# Altium PCB 3-motors-1-board.pcbdoc (part 1 of 2)
Units mil, origin at the board's own origin, x right, y up, seen from the top; angles counter-clockwise.
Board outline 3965 x 3335 mil, 4 copper layers (Top Layer, GND, PWR, Bottom Layer), stack 37.817 mil thick; 63 components, 69 nets, 278 pads, 85 vias.
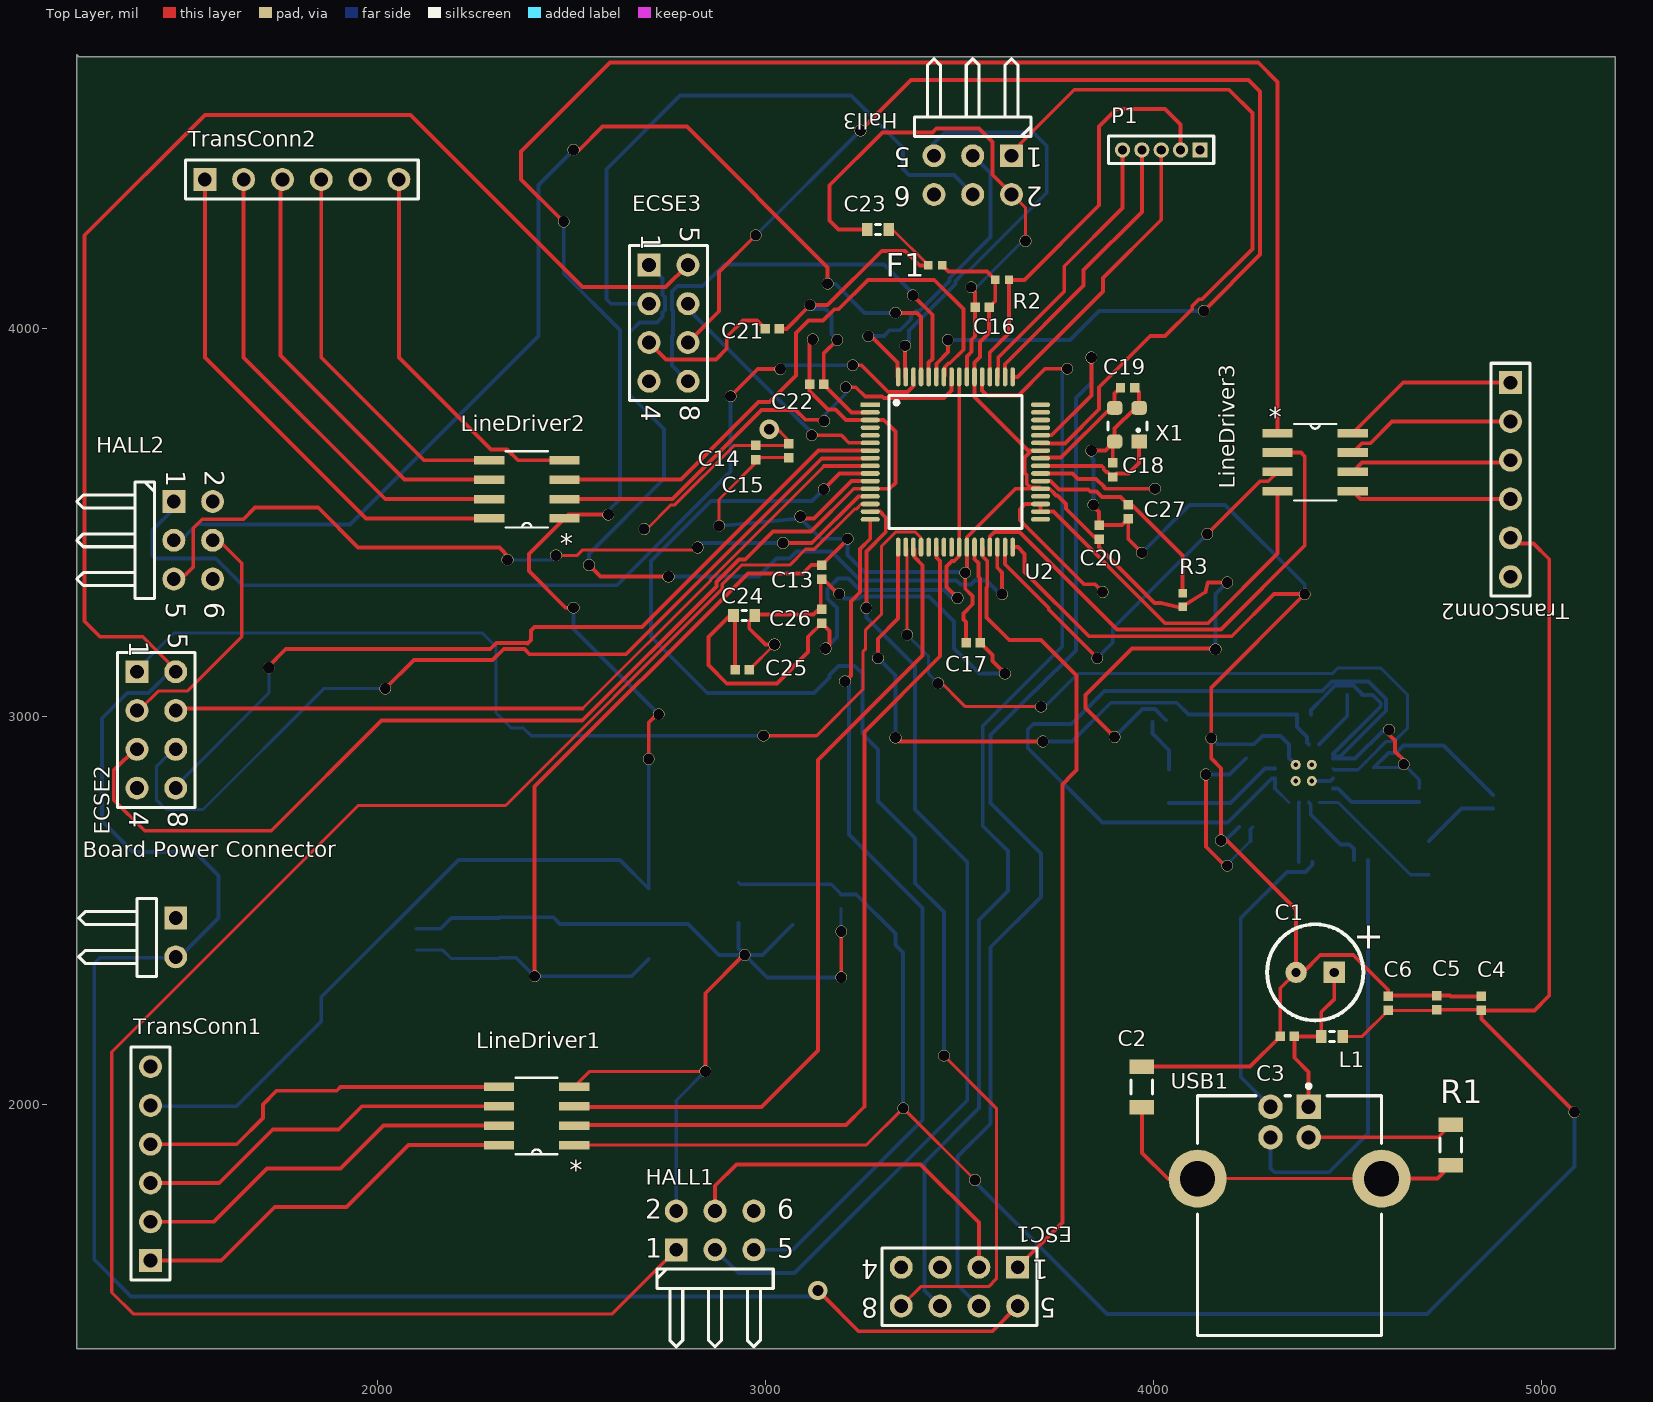
[diagram p0: Top Layer view]
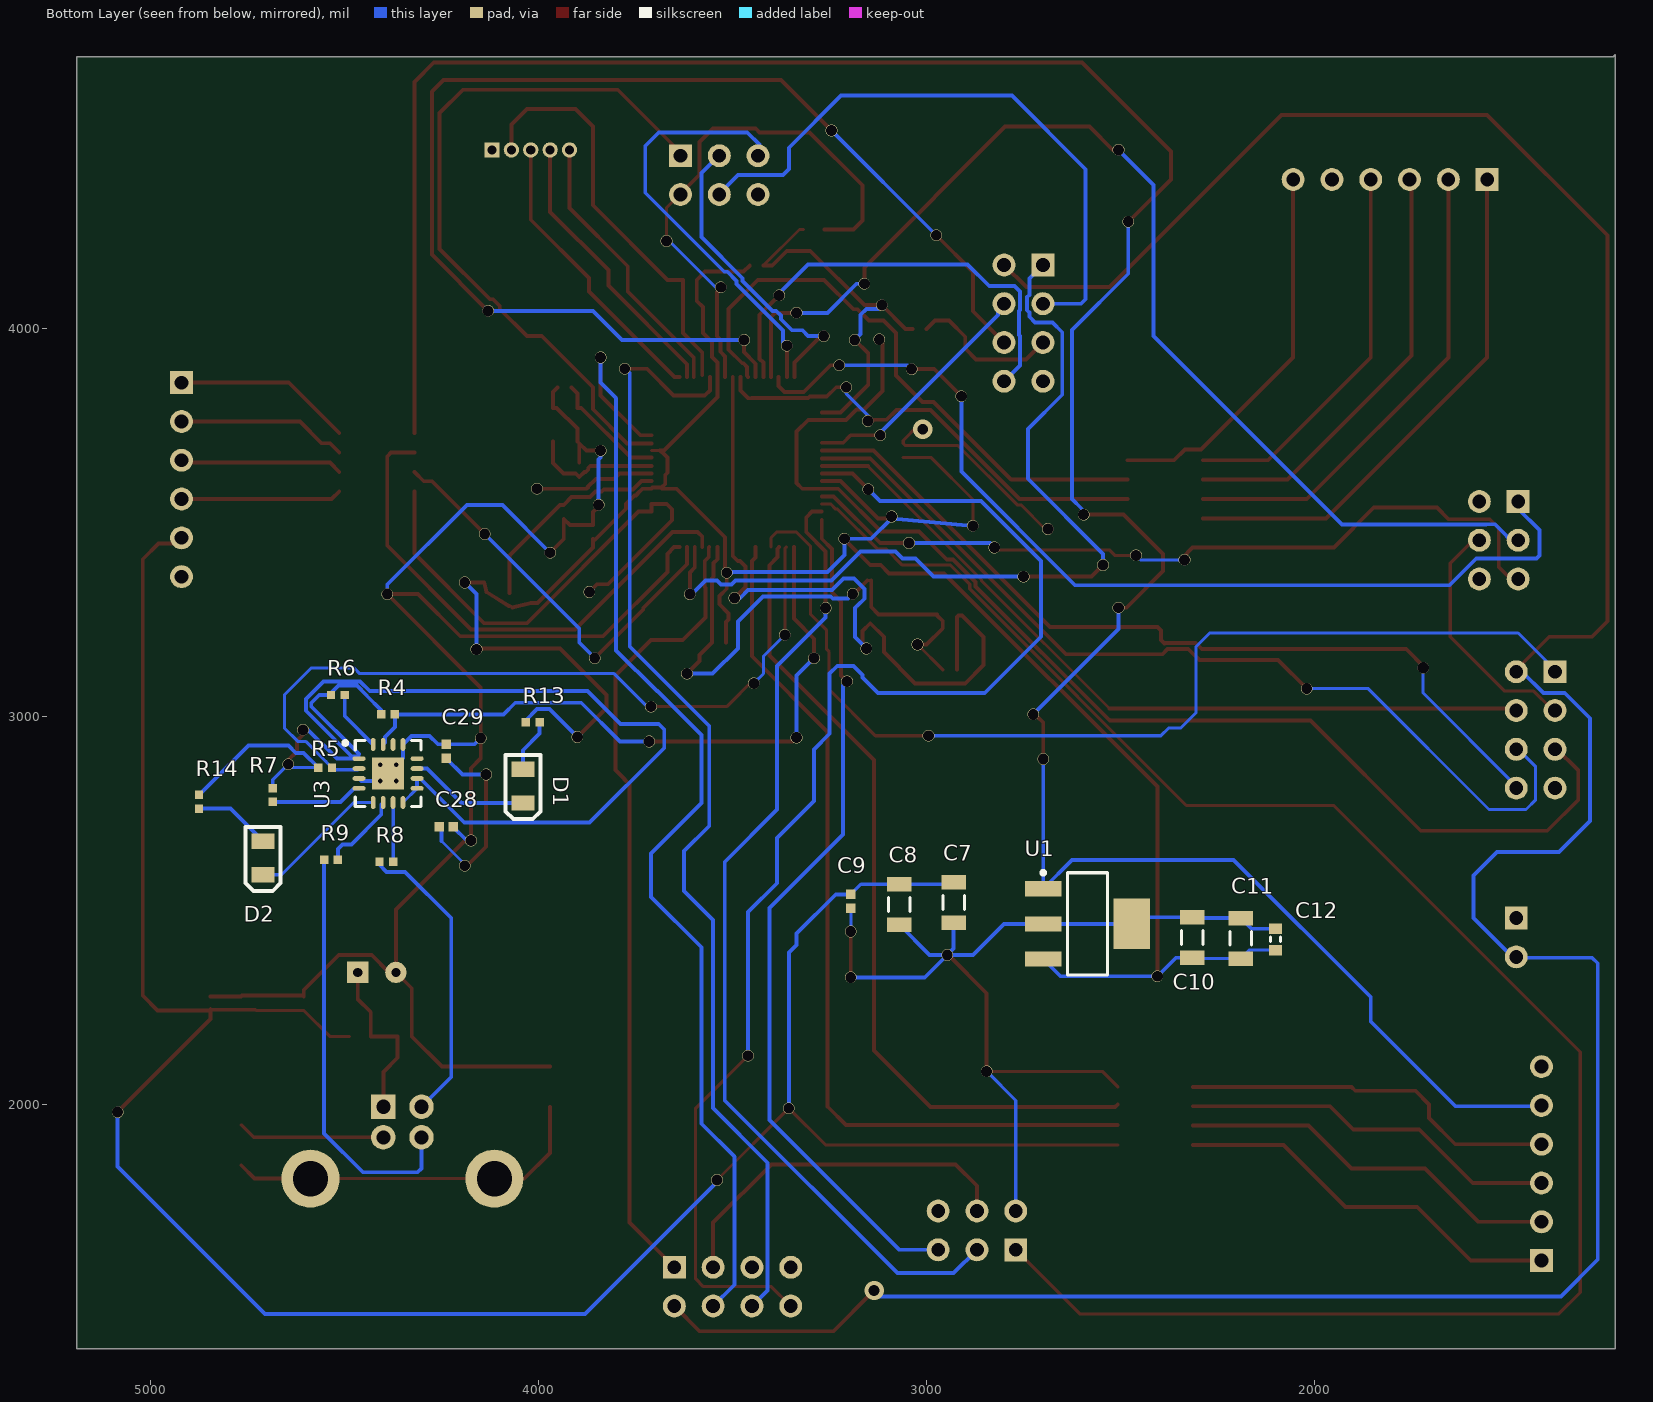
[diagram p1: Bottom Layer view, seen from below]
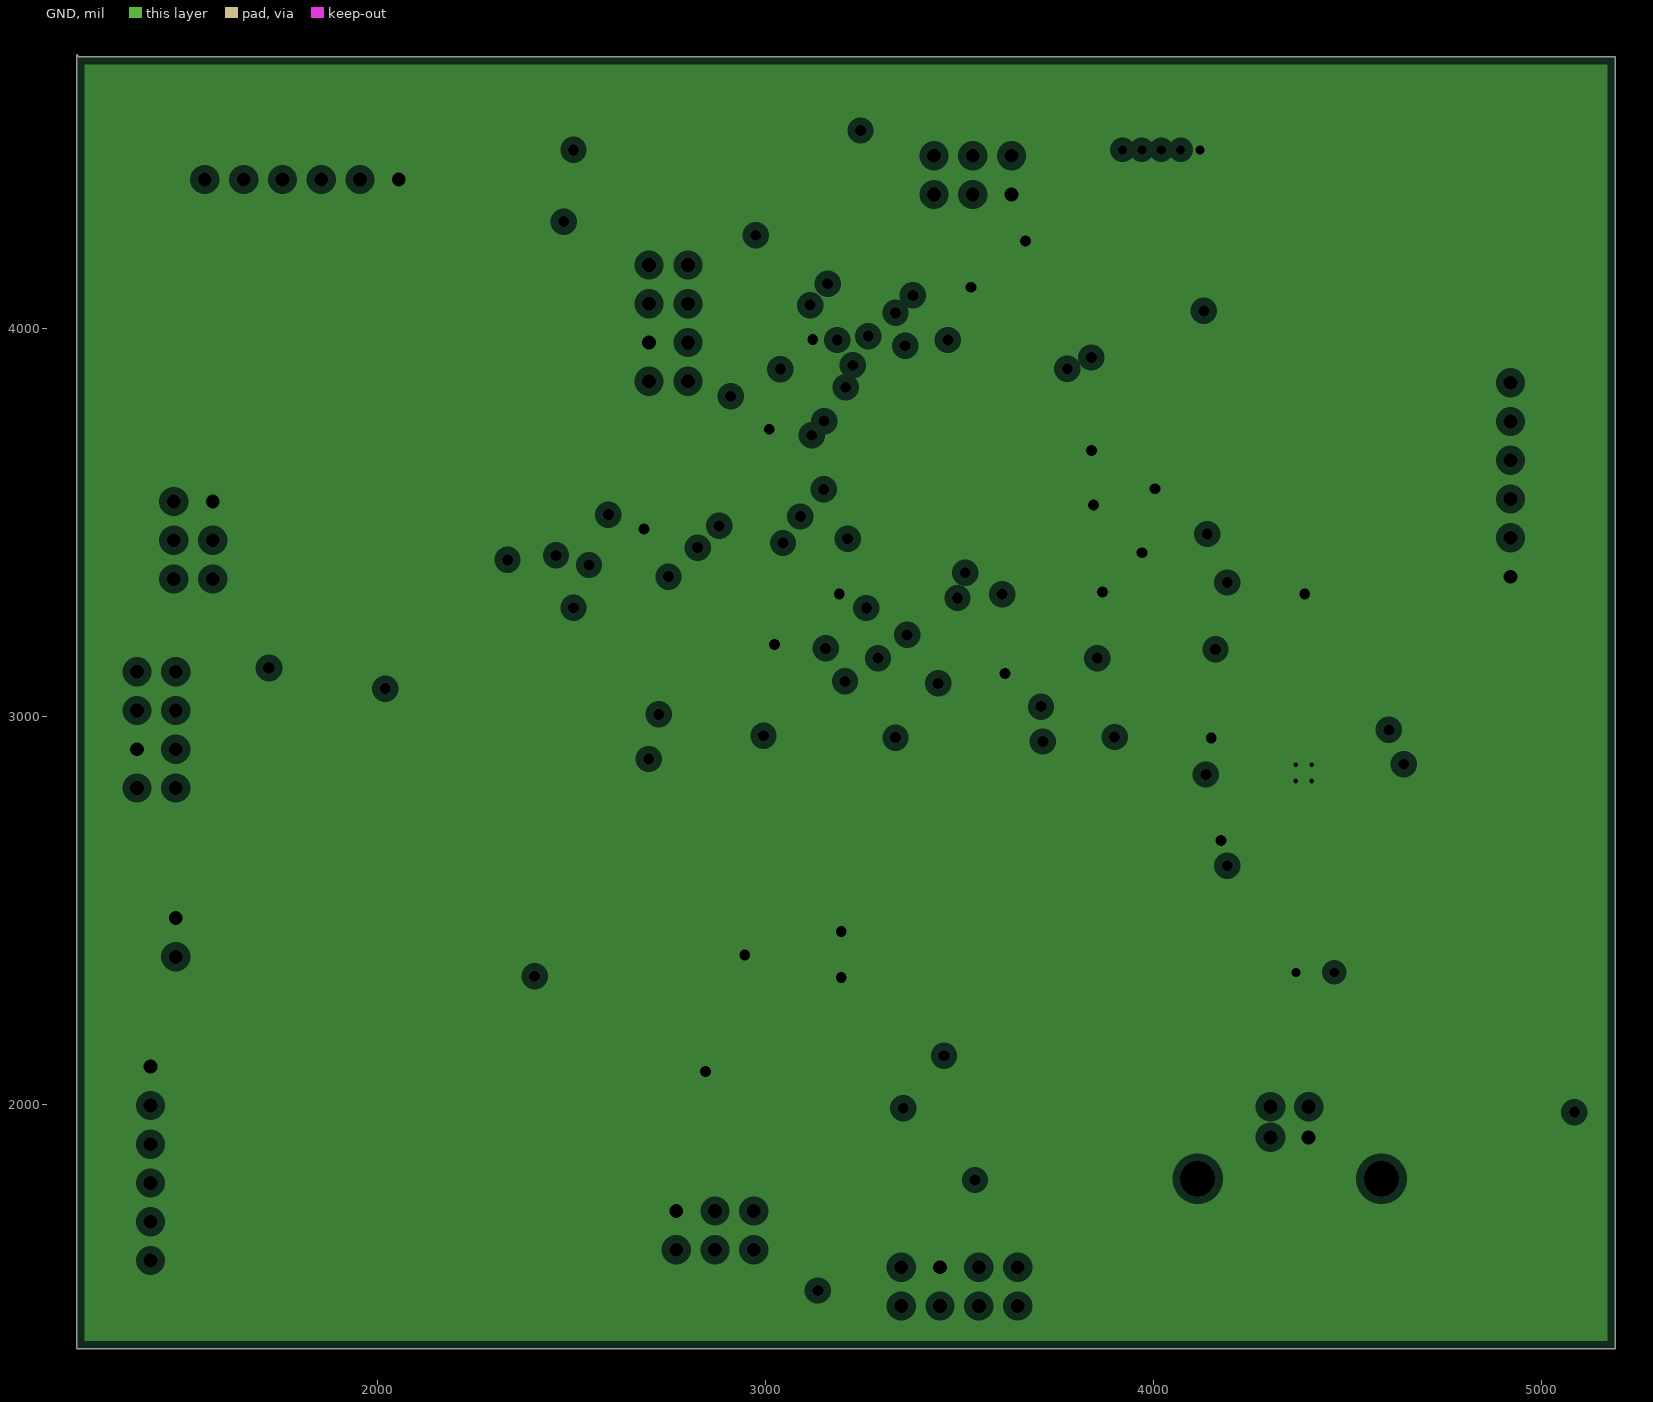
[diagram p2: GND, clearances drawn from the general rule]
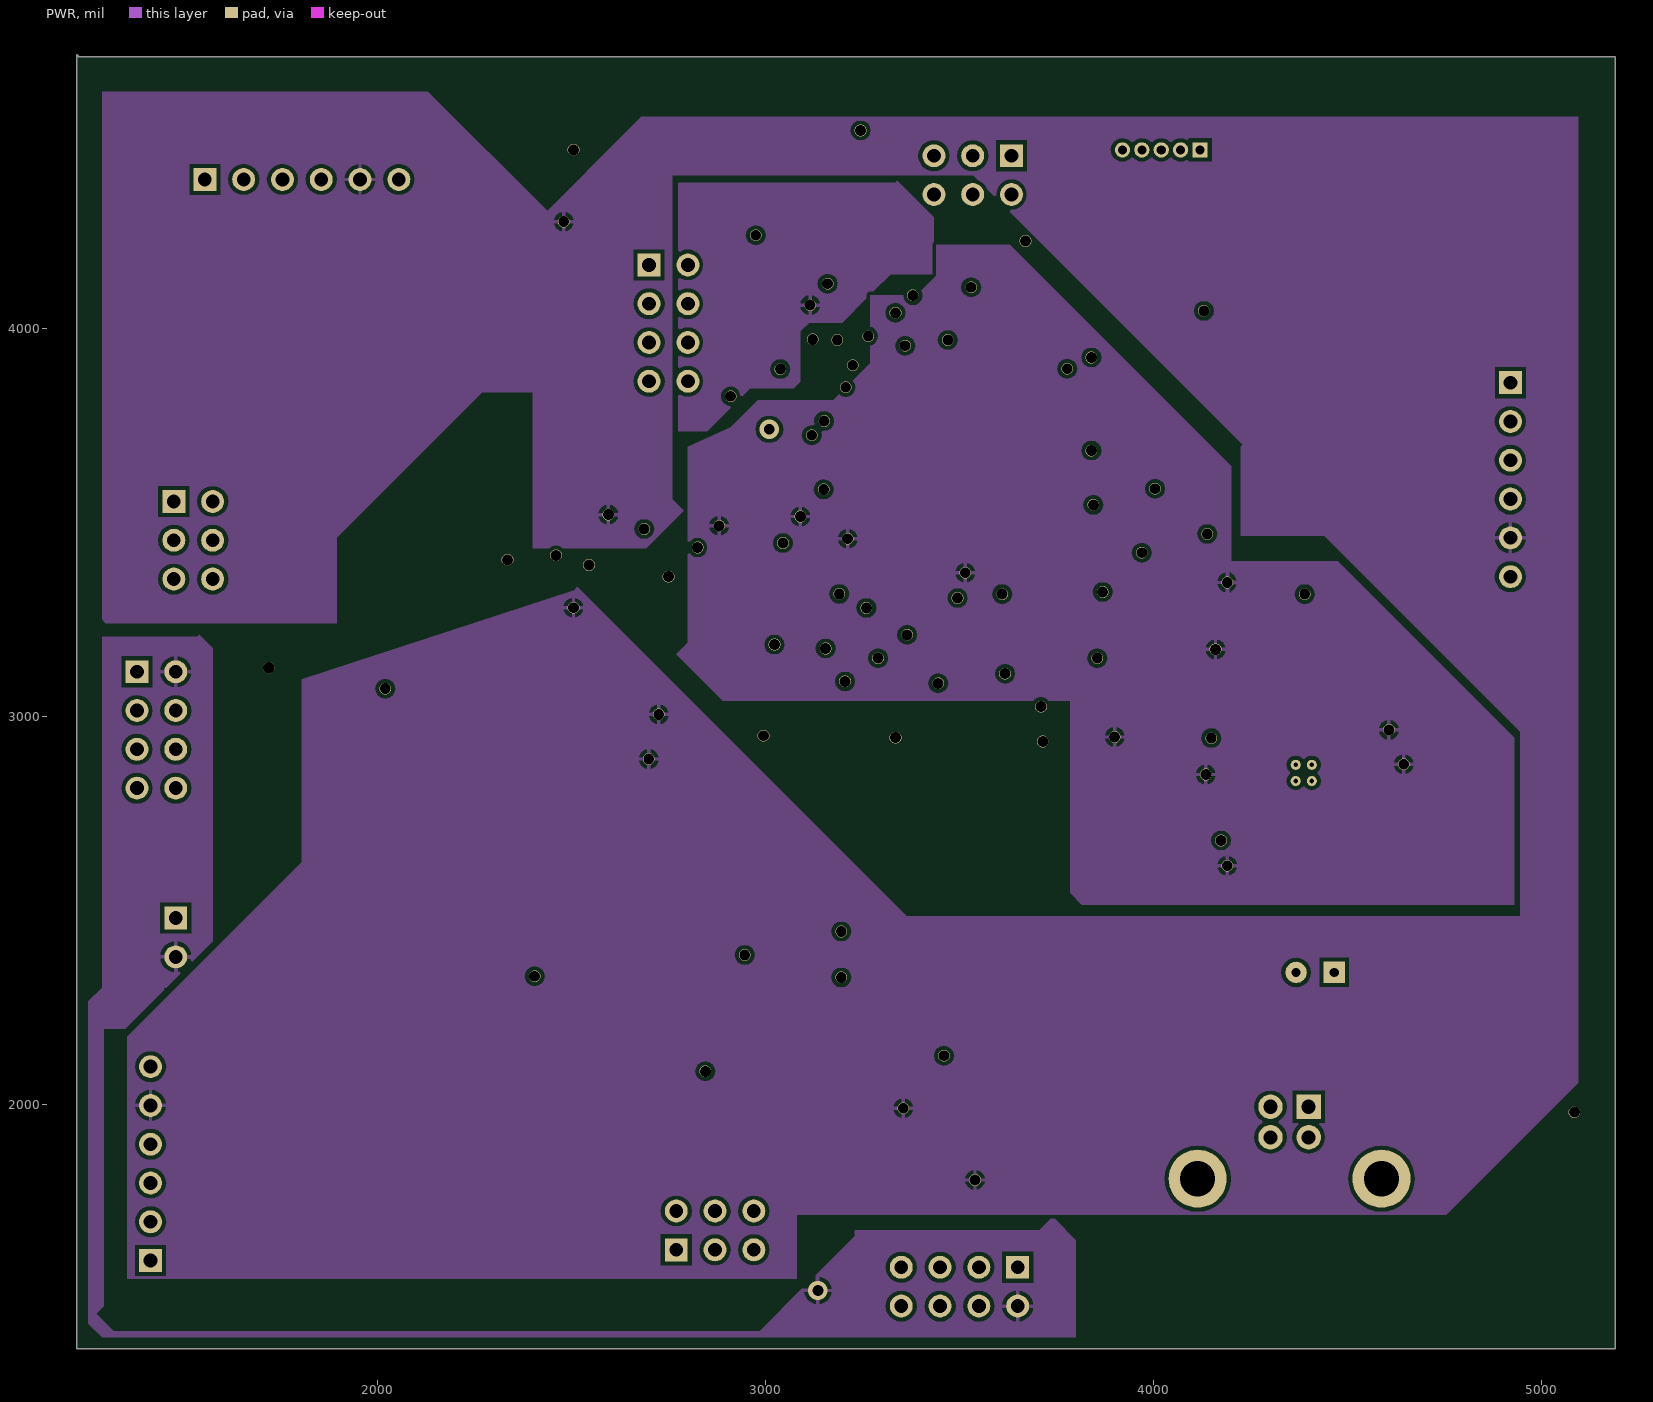
[diagram p3: PWR]
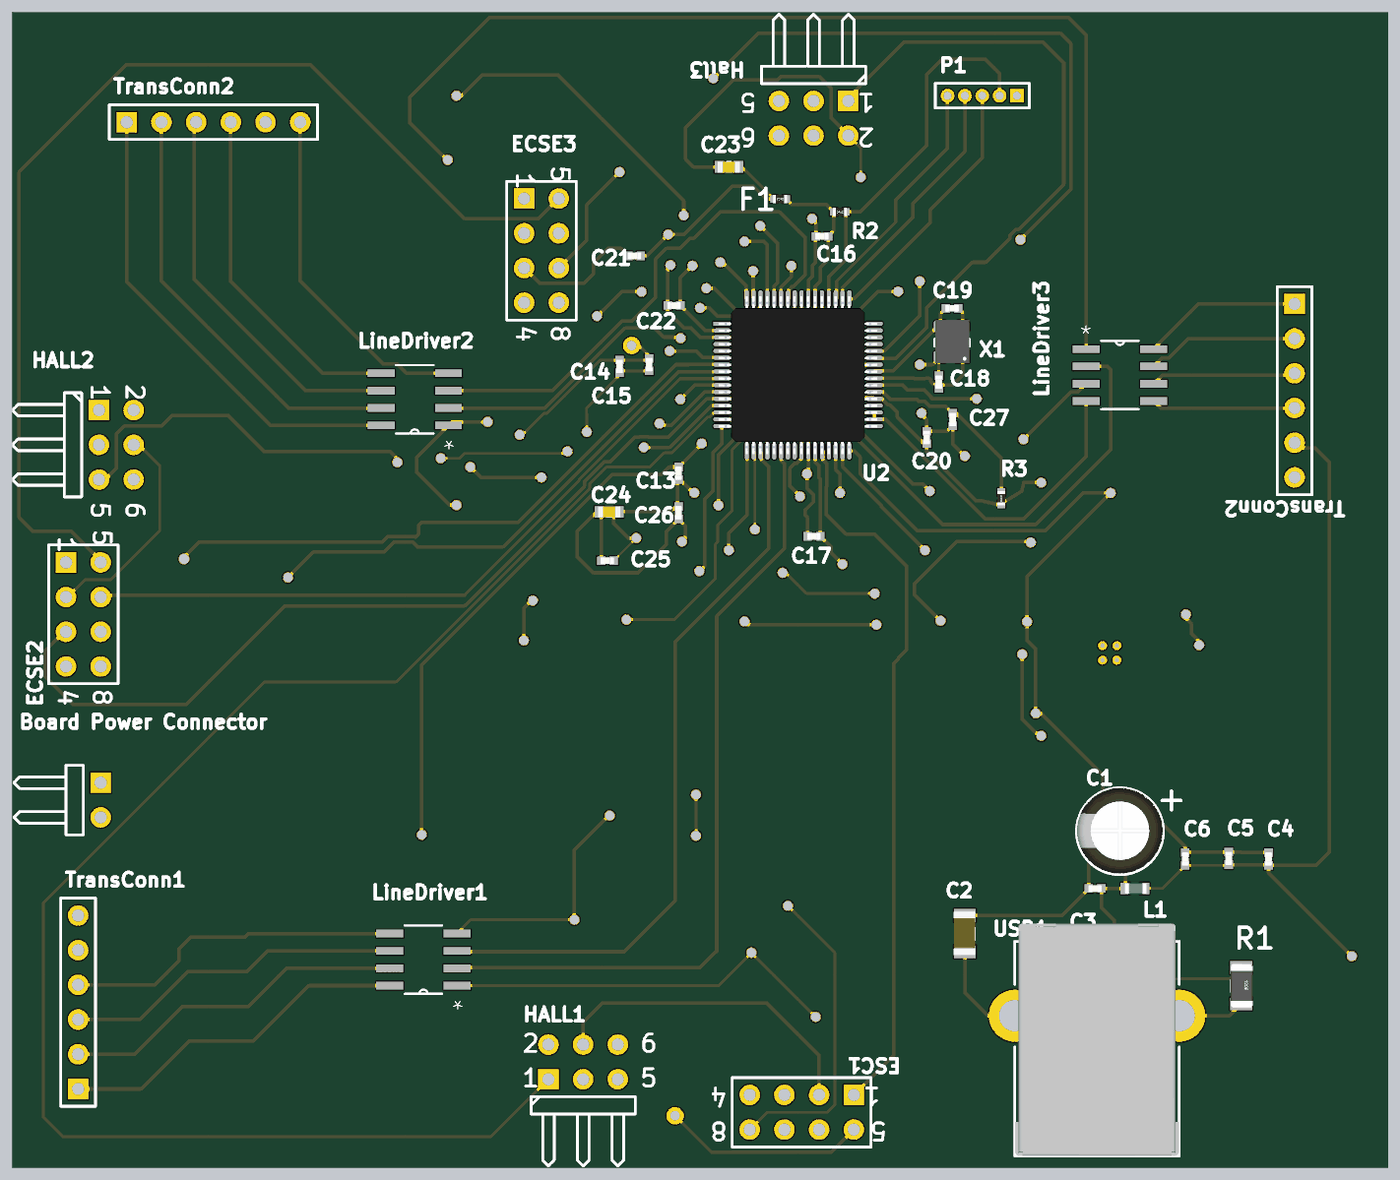
[diagram p4: 3D render of the assembled board from above, using the file's embedded part models]
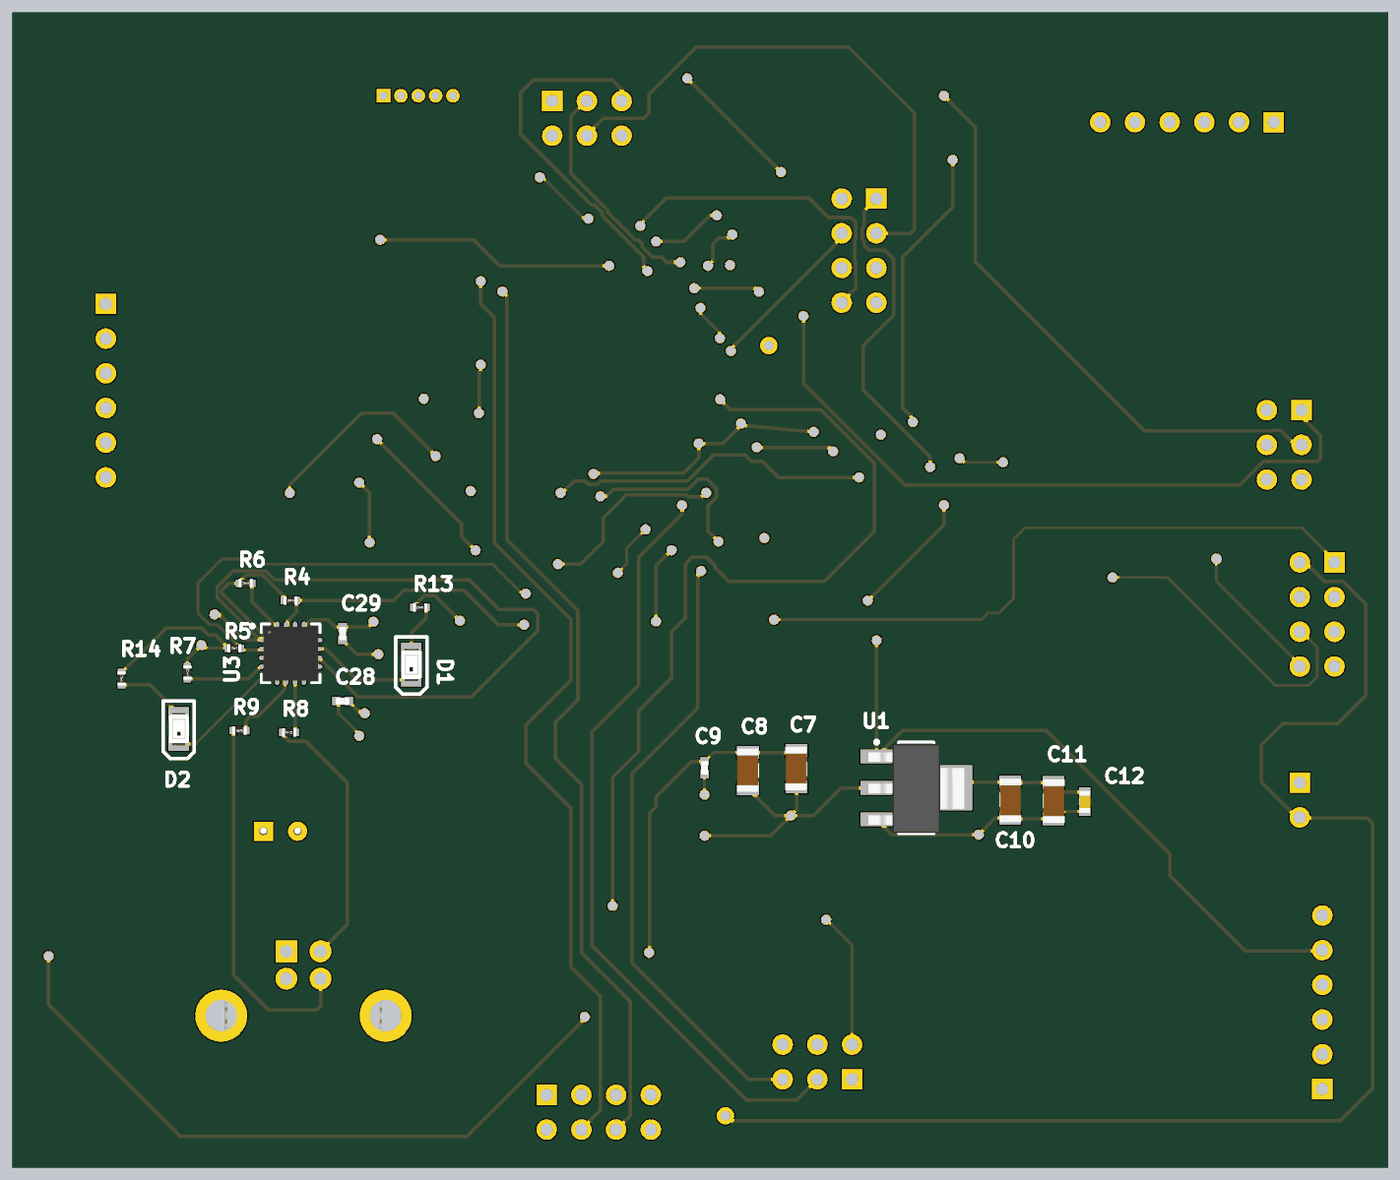
[diagram p5: 3D render of the assembled board from below, using the file's embedded part models]

## Layer stack, top to bottom
Top Solder: solder mask 0.4, Solder Resist, Dk 3.5
Top Layer: signal copper 1.4
Dielectric 3: dielectric 10, Dk 4.2
GND: plane copper 1, net GND
Dielectric 1: dielectric 12.6, FR-4, Dk 4.8
PWR: signal copper 1.417
Dielectric 2: dielectric 10, Dk 4.2
Bottom Layer: signal copper 1.4
Bottom Solder: solder mask 0.4, Solder Resist, Dk 3.5

## Board outline
1225,4705 1230,4700 5190,4700 5190,1370 1225,1370

## Design rules (kind name [scope] priority, off if disabled: settings)
Clearance Clearance_1 [All] p1: gap=10 ignorepadtopadclearanceinfootprint=TRUE except(0: Arc-Hole Track-Hole SMDPad-Hole THPad-Hole Via-Hole Fill-Hole Poly-Hole Region-Hole Text-Hole; 6: Arc-Arc Arc-Track Arc-SMDPad Arc-THPad Track-Track Track-SMDPad Track-THPad SMDPad-SMDPad SMDPad-THPad THPad-THPad)
Clearance [All] p2: gap=10 ignorepadtopadclearanceinfootprint=TRUE except(0: Arc-Hole Track-Hole SMDPad-Hole THPad-Hole Via-Hole Fill-Hole Poly-Hole Region-Hole Text-Hole; 6: Arc-Arc Arc-Track Arc-SMDPad Arc-THPad Track-Track Track-SMDPad Track-THPad SMDPad-SMDPad SMDPad-THPad THPad-THPad)
MinimumSolderMaskSliver [All] p1: minsoldermaskwidth=2
PlaneClearance [All] p1: clearance=20
PlaneConnect [All] p1: planeconnectstyle=Relief reliefexpansion=10 reliefentries=4 reliefconductorwidth=10 reliefairgap=8
PolygonConnect [All] p1: connectstyle=Relief reliefconductorwidth=10 reliefentries=4 polygonreliefangle="90 Angle" airgapwidth=10
RoutingVias [All] p1: holewidth=28 width=30 viastyle="Through Hole" minholewidth=28 minwidth=30 maxholewidth=28 maxwidth=50
SilkToSilkClearance [All] p1: silktosilkclearance=2
SilkToSolderMaskClearance [IsPad] p1: minsilkscreentomaskgap=2 clearancetoexposedcopper=TRUE
SolderMaskExpansion [All] p1: expansion=4
Width [All] p1: maxlimit=10 minlimit=6 preferedwidth=10 toplayer_prefwidth=8 midlayer1_minwidth=10 bottomlayer_prefwidth=8 minimp=50.000000 maximp=50.000000 favimp=50.000000
25 further rules are at their usual default settings.

## Components (designator, comment, footprint, x,y, rotation, side; value= is the part's Value field where it differs from the comment)
"Board Power Connector" "Molex 0428202224" HDR1X2H 1480,2480 r270 top
C1 "100uF" CapAlu6.3mmx12.5mm 4416.89,2340 r0 top
C2 "10nF" CAP_1206 3970,2045 r270 top
C3 "10nF" CAP_0402_M 4345,2175 r0 top
C4 "100nF" CAP_0402_M 4845,2260 r270 top
C5 "2.2uF" CAP_0402_M 4730,2261.89 r270 top
C6 "2.2uF" CAP_0402_M 4605,2260 r270 top
C7 "100uF" CAP_1206 2930,2520 r270 bottom
C8 "100uF" CAP_1206 3070,2515 r270 bottom
C9 "1uF" CAP_0402_M 3195,2523.11 r90 bottom
C10 "100uF" CAP_1206 2315,2430 r90 bottom
C11 "100uF" CAP_1206 2190,2427.83 r90 bottom
C12 "10uF" CAP_0603 2100,2425 r90 bottom
C13 "10nF" CAP_0402_M 3145,3371.89 r90 top
C14 "100nF" CAP_0402_M 3060,3685 r270 top
C15 "100nF" CAP_0402_M 2975,3680 r270 top
C16 "10nF" CAP_0402_M 3558.39,4055 r0 top
C17 "100nF" CAP_0402_M 3535,3190 r180 top
C18 "13pF" CAP_0402_M 3895,3635 r270 top
C19 "13pF" CAP_0402_M 3933.11,3847.4 r180 top
C20 "100nF" CAP_0402_M 3860,3475 r270 top
C21 "10nF" CAP_0402_M 3017.92,3998.6 r0 top
C22 "100nF" CAP_0402_M 3131.89,3855.57 r0 top
C23 "10uF" CAP_0603 3290,4255 r0 top
C24 "2.2uF" CAP_0603 2945,3260 r180 top
C25 "1uF" CAP_0402_M 2940,3120 r180 top
C26 "100nF" CAP_0402_M 3145,3258.11 r270 top
C27 "100nF" CAP_0402_M 3935,3526.89 r90 top
C28 "100nF" CAP_0402_M 4238.11,2715 r0 bottom
C29 "100nF" CAP_0402_M 4238.11,2910 r270 bottom
D1 "Led Red" "TOPLED 0805" 4040,2820 r270 bottom
D2 "Led Red" "TOPLED 0805" 4710,2635 r270 bottom
ECSE2 "Molex 430450812" HDR2X4_CEN 1380,3115 r270 top
ECSE3 "Molex 430450812" HDR2X4_CEN 2700,4163.56 r270 top
ESC1 "Molex 430450812" HDR2X4_CEN 3650,1580 r180 top
F1 "550mA" RES_0402_M 3437.72,4162.35 r180 top
HALL1 "Molex 430450600" HDR2X3H 2770,1625 r0 top
HALL2 "Molex 430450600" HDR2X3H 1475,3553.78 r270 top
Hall3 "Molex 430450600" HDR2X3H 3634.07,4445 r180 top
L1 "200R" IND_0603 4460,2175 r0 top
LineDriver1 "SN75LBC179D" D8 2410,1970 r180 top
LineDriver2 "SN75LBC179D" D8 2385,3585 r180 top
LineDriver3 "SN75LBC179D" D8 4416.71,3655 r0 top
P1 "MHDR1X5" MHDR1X5 4120,4460 r180 top
R1 "1M" RES_1206 4766.22,1895 r270 top
R2 "10k" RES_0402_M 3610,4125 r0 top
R3 "10k" RES_0402_M 4075,3300 r90 top
R4 "10k" RES_0402_M 4388.11,3005 r0 bottom
R5 "10k" RES_0402_M 4550,2867.65 r0 bottom
R6 "10k" RES_0402_M 4517.28,3055 r0 bottom
R7 "10k" RES_0402_M 4685,2797.28 r90 bottom
R8 "27" RES_0402_M 4392.28,2625 r180 bottom
R9 "27" RES_0402_M 4535,2630 r180 bottom
R13 "120" RES_0402_M 4015,2985 r0 bottom
R14 "120" RES_0402_M 4875,2780 r90 bottom
TransConn1 "Header 6" HDR1X6 1415,1597.17 r90 top
TransConn2 "Header 6" HDR1X6 4920,3860 r270 top
TransConn2 "Header 6" HDR1X6 1555,4383.8 r0 top
U1 "MCP1825S-3302E/DB" SOT230P700X180-4N 2585,2465 r180 bottom
U2 "TM4C123GH6PMI" TSQFP50P1200X1200X120-64N 3341.85,3875 r0 top
U3 "FT230XQ" QFN65P400X400X80_HS-17N 4387.79,2852.67 r180 bottom
USB1 "USB type-B jack" USB2.5-2H4E 4350.79,1954.37 r270 top
X1 "CRYSTAL 16MHZ" CRYSTAL_3.2x2.5 3962.99,3708.39 r180 top

## Footprints (in the part's own frame and the unit in brackets; to place one, negate y for a bottom-side part, rotate by r counter-clockwise, add the part's x,y. Pads: shape width x height; smd on the part's side, far side on the other; paste and mask are expansions set on the pad)
CAP_0402_M [mm] "Chip Capacitor, 2-Leads, Body 1.00x0.50mm, IPC Medium Density"
  rect 0.62x0.62 smd: 1(-0.46,0) 2(0.46,0)
  body extent -0.5,-0.26 0.5,0.27, height 0.36
CAP_0603 [mm] "Chip Capacitor, 2-Leads, Body 1,6x0,8mm, IPC High Density"
  rect 0.7x0.85 smd: 1(-0.7,0) 2(0.7,0)
  silkscreen extent -0.15,-0.33 0.15,0.33, body extent -0.8,-0.42 0.8,0.38, height 0.7
CAP_1206 [mm] "Chip Capacitor, 2-Leads, Body 3,1x1,6mm, IPC High Density"
  rect 0.95x1.6 smd: 1(-1.325,0) 2(1.325,0)
  silkscreen extent -0.45,-0.7 0.45,0.7, body extent -1.62,-0.82 1.57,0.78, height 1.6
CapAlu6.3mmx12.5mm [mm] "Capacitor Aluminum 6.3mm OD"
  rect 1.4x1.4 hole 0.6: 1(1.25,0)
  round 1.4 hole 0.6: 2(-1.25,0)
  silkscreen extent -3.15,-3.15 3.15,3.15, body extent -3.15,-3.11 3.15,3.19, height 12
CRYSTAL_3.2x2.5 [mm]
  rect 1x0.9 smd: 1(0,0)
  rrect50% 1x0.9 smd: 2(0,-2.2) 3(1.6,-2.2) 4(1.6,0)
  silkscreen extent -0.51,-1.27 2.03,-0.69, body extent -0.5,-2.7 2,0.5, height 0.93
D8 [mil]
  rect 78x22 smd: 1(-97,75) 2(-97,25) 3(-97,-25) 4(-97,-75) 5(97,-75) 6(97,-25) 7(97,25) 8(97,75)
  silkscreen extent -54,-98 54,98, body extent 0,0 10,10, height 10
HDR1X2H [mm] "Connector; Header; 2 Position; Right Angle"
  rect 1.5x1.5 hole 0.9: 1(0,0)
  round 1.5 hole 0.9: 2(2.54,0)
  silkscreen extent -1.27,-6.35 3.81,-1.27
HDR1X6 [mm] "Connector; Header; 6 Position"
  rect 1.5x1.5 hole 0.9: 1(0,0)
  round 1.5 hole 0.9: 2(2.54,0) 3(5.08,0) 4(7.62,0) 5(10.16,0) 6(12.7,0)
  silkscreen extent -1.27,-1.27 13.97,1.27
HDR2X3H [mm] "Connector; Header; 3x2 Position; Right Angle"
  rect 1.5x1.5 hole 0.9: 1(0,0)
  round 1.5 hole 0.9: 2(0,2.54) 3(2.54,0) 4(2.54,2.54) 5(5.08,0) 6(5.08,2.54)
  silkscreen extent -1.27,-6.35 6.35,-1.27
HDR2X4_CEN [mm] "Connector; Header; 4x2 Position"
  rect 1.5x1.5 hole 0.9: 1(0,0)
  round 1.5 hole 0.9: 2(2.54,0) 3(5.08,0) 4(7.62,0) 5(0,2.54) 6(2.54,2.54) 7(5.08,2.54) 8(7.62,2.54)
  silkscreen extent -1.27,-1.27 8.89,3.81
IND_0603 [mm]
  rect 0.7x0.85 smd: 1(-0.7,0) 2(0.7,0)
  silkscreen extent -0.15,-0.33 0.15,0.33, body extent -0.74,-0.4 0.86,0.4, height 0.95
MHDR1X5 [mm] "Connector; Header; 5 Position"
  rect 1x1 hole 0.6: 1(0,0)
  round 1 hole 0.6: 2(1.27,0) 3(2.54,0) 4(3.81,0) 5(5.08,0)
  silkscreen extent -0.9,-0.9 5.98,0.9
QFN65P400X400X80_HS-17N [mm] "QFN, 16-Leads, Body 4.00x4.00mm, Pitch 0.65mm, Thermal Pad 2.08x2.08mm, IPC Medium Density"
  oval 0.85x0.3 smd: 1(-1.9,0.975) 2(-1.9,0.325) 3(-1.9,-0.325) 4(-1.9,-0.975) 9(1.9,-0.975) 10(1.9,-0.325) 11(1.9,0.325) 12(1.9,0.975)
  oval 0.3x0.85 smd: 5(-0.975,-1.9) 6(-0.325,-1.9) 7(0.325,-1.9) 8(0.975,-1.9) 13(0.975,1.9) 14(0.325,1.9) 15(-0.325,1.9) 16(-0.975,1.9)
  round 0.66 hole 0.305: 17(-0.516,-0.493) 17(-0.516,0.567) 17(0.538,-0.493) 17(0.538,0.567)
  rect 2.08x2.08 smd: 17(0,0)
  silkscreen extent -2.93,-2.15 2.15,2.15, body extent -2,-2 2,2, height 0.92
RES_0402_M [mm] "Chip Resistor, 2-Leads, Body 1.00x0.50mm, IPC Medium Density"
  rect 0.55x0.55 smd: 1(-0.45,0) 2(0.45,0)
  body extent -0.52,-0.3 0.52,0.3, height 0.34
RES_1206 [mm] "Chip Resistor 2-Leads, Body 3,1x1,6mm, IPC High Density"
  rect 0.95x1.6 smd: 1(-1.325,0) 2(1.325,0)
  silkscreen extent -0.45,-0.7 0.45,0.7, body extent -1.59,-0.76 1.61,0.84, height 1
SOT230P700X180-4N [mm] "SOT223, 4-Leads, Body 6,7x7,3mm (max), Pitch 2,30mm, IPC Medium Density"
  rect 2.4x1 smd: 1(-2.9,2.3) 2(-2.9,0) 3(-2.9,-2.3)
  rect 2.4x3.3 smd: 4(2.9,0)
  silkscreen extent -3.03,-3.35 1.3,3.47, body extent -3.5,-3.3 3.5,3.2, height 1.69
"TOPLED 0805" [mm]
  rect 1x1.5 smd: 1(-1.1,0) 2(1.1,0)
  silkscreen extent -2.03,-1.14 2.16,1.14, body extent -1.2,-0.74 1.2,0.76, height 1.45
TSQFP50P1200X1200X120-64N [mm] "TSQFP, 64-Leads, Body 12,0x12,0mm (max), Pitch 0,50mm, IPC Medium Density"
  rect 1.25x0.3 smd: 1(-1.825,-1.825)
  oval 1.25x0.3 smd: 2(-1.825,-2.325) 3(-1.825,-2.825) 4(-1.825,-3.325) 5(-1.825,-3.825) 6(-1.825,-4.325) 7(-1.825,-4.825) 8(-1.825,-5.325) 9(-1.825,-5.825) 10(-1.825,-6.325) 11(-1.825,-6.825) 12(-1.825,-7.325) 13(-1.825,-7.825) 14(-1.825,-8.325) 15(-1.825,-8.825) 16(-1.825,-9.325) 33(9.325,-9.325) 34(9.325,-8.825) 35(9.325,-8.325) 36(9.325,-7.825) 37(9.325,-7.325) 38(9.325,-6.825) 39(9.325,-6.325) 40(9.325,-5.825) 41(9.325,-5.325) 42(9.325,-4.825) 43(9.325,-4.325) 44(9.325,-3.825) 45(9.325,-3.325) 46(9.325,-2.825) 47(9.325,-2.325) 48(9.325,-1.825)
  oval 0.3x1.25 smd: 17(0,-11.15) 18(0.5,-11.15) 19(1,-11.15) 20(1.5,-11.15) 21(2,-11.15) 22(2.5,-11.15) 23(3,-11.15) 24(3.5,-11.15) 25(4,-11.15) 26(4.5,-11.15) 27(5,-11.15) 28(5.5,-11.15) 29(6,-11.15) 30(6.5,-11.15) 31(7,-11.15) 32(7.5,-11.15) 49(7.5,0) 50(7,0) 51(6.5,0) 52(6,0) 53(5.5,0) 54(5,0) 55(4.5,0) 56(4,0) 57(3.5,0) 58(3,0) 59(2.5,0) 60(2,0) 61(1.5,0) 62(1,0) 63(0.5,0) 64(0,0)
  silkscreen extent -0.6,-9.92 8.1,-1.22, body extent -2.05,-11.38 9.53,0.2, height 1
USB2.5-2H4E [mm] "Connector; USB1.1, Type B, Thru-Hole; 4 Position; Right Angle"
  rect 1.6x1.6 hole 0.92: 1(-1,1.25)
  round 1.6 hole 0.92: 2(-1,-1.25) 3(1,-1.25) 4(1,1.25)
  round 3.8 hole 2.3: 5(3.71,6.02) 6(3.71,-6.02)
  silkscreen extent -2.47,-6.02 13.99,6.02, body extent -3.03,-6 13.97,6, height 10.9

## Part data
"Board Power Connector": library part "Header 2H", "Header, 2-Pin, Right Angle", LatestRevisionDate=17-Jul-2002, LatestRevisionNote="Re-released for DXP Platform.", Publisher="Altium Limited"
C1: library part 100uF_35v_6.3x12.5, "Capacitor 35v 100uF 6.3mm", Capacitance=100µF, ESR (Equivalent Series Resistance)=-, Lifetime @ Temp.="5000 Hrs @ 105°C", Manufacturer=Nichicon, Manufacturer Part Number=UHV1V101MED, Operating Temperature="-40°C ~ 105°C", Package / Case="Radial, Can", Ripple Current="220mA @ 120Hz", Supplier Part Number 1=493-13394-ND, Tolerance=±20%, Voltage Rating=35V, Applications="General Purpose", Category=Capacitors, ComponentLink1Description=http://nichicon-us.com/english/products/pdfs/e-uhv.pdf, ComponentLink1URL=http://nichicon-us.com/english/products/pdfs/e-uhv.pdf, Height - Seated (Max)="0.492\" (12.50mm)", Impedance="100 mOhm", Lead Spacing="0.098\" (2.50mm)", Mounting Type="Through Hole", Packaging=Bulk, Polarization=Polar, Pricing 1="1=0.46, 10=0.32, 25=0.262, 50=0.224, 100=0.1919, 250=0.15992, 500=0.14394, 1000=0.12155, 2500=0.11515 (CAD)", RoHS="RoHS Compliant", Size / Dimension="0.248\" Dia (6.30mm)", Stock 1=5561, Supplier 1=Digi-Key, Surface Mount Land Size=-
C2: library part 10nF_500V_1206, "CAP CER 10000PF 500V X7R 1206", Capacitance=10000pF, Manufacturer="Samsung Electro-Mechanics America, Inc", Manufacturer Part Number=CL31B103KGFNNNE, Operating Temperature="-55°C ~ 125°C", Package / Case="1206 (3216 Metric)", Ratings=-, Supplier Part Number 1=1276-3076-1-ND, Temperature Coefficient=X7R, Tolerance=±10%, Voltage - Rated=500V, Applications="General Purpose", Category=Capacitors, ComponentLink1Description=http://www.samsungsem.com/kr/front/downloadcms.do?path=/kr/support/product-search/mlcc/__icsFiles/afieldfile/2014/11/05&fileName=S_CL31B103KGFNNNE.pdf, ComponentLink1URL=http://www.samsungsem.com/kr/front/downloadcms.do?path=/kr/support/product-search/mlcc/__icsFiles/afieldfile/2014/11/05&fileName=S_CL31B103KGFNNNE.pdf, Features=-, Height - Seated (Max)=-, Lead Spacing=-, Lead Style=-, Mounting Type="Surface Mount, MLCC", Packaging="Cut Tape (CT)", Pricing 1="1=0.34, 10=0.28, 25=0.192, 100=0.1398, 500=0.09266, 1000=0.08216 (CAD)", RoHS="RoHS Compliant", Size / Dimension="0.126\" L x 0.063\" W (3.20mm x 1.60mm)", Stock 1=9075, Supplier 1=Digi-Key, Thickness (Max)="0.055\" (1.40mm)"
C3 C13 C16 C21: library part 10nF_50V_0402, "CAP CER 10000PF 50V 10% X7R 0402", Capacitance=10000pF, Manufacturer=Kemet, Manufacturer Part Number=C0402C103K5RACTU, Operating Temperature="-55°C ~ 125°C", Package / Case="0402 (1005 Metric)", Ratings=-, Supplier Part Number 1=399-3066-1-ND, Temperature Coefficient=X7R, Tolerance=±10%, Voltage - Rated=50V, Applications="General Purpose", Category=Capacitors, ComponentLink1Description=http://www.kemet.com/docfinder?Partnumber=C0402C103K5RACTU, ComponentLink1URL=http://www.kemet.com/docfinder?Partnumber=C0402C103K5RACTU, Features=-, Height - Seated (Max)=-, Lead Spacing=-, Lead Style=-, Mounting Type="Surface Mount, MLCC", Packaging="Cut Tape (CT)", Pricing 1="1=0.14, 10=0.037, 25=0.026, 50=0.0198, 100=0.0166, 250=0.01364, 1000=0.00893, 2500=0.00804, 5000=0.00744 (CAD)", RoHS="RoHS Compliant", Size / Dimension="0.039\" L x 0.020\" W (1.00mm x 0.50mm)", Stock 1=3556921, Supplier 1=Digi-Key, Thickness (Max)="0.022\" (0.55mm)"
C4 C14 C15 C17 C20 C22 C26 C27 C28 C29: library part 100nF_50V_0402, "CAP CER 100NF 50V 20% X5R 0402", Capacitance=0.1µF, Manufacturer="TDK Corporation", Manufacturer Part Number=C1005X5R1H104M050BB, Operating Temperature="-55°C ~ 85°C", Package / Case="0402 (1005 Metric)", Ratings=-, Supplier Part Number 1=445-5943-1-ND, Temperature Coefficient=X5R, Tolerance=±20%, Voltage - Rated=50V, Applications="General Purpose", Category=Capacitors, ComponentLink1Description=http://product.tdk.com/en/catalog/datasheets/mlcc_commercial_general_en.pdf, ComponentLink1URL=http://product.tdk.com/en/catalog/datasheets/mlcc_commercial_general_en.pdf, Features=-, Height - Seated (Max)=-, Lead Spacing=-, Lead Style=-, Mounting Type="Surface Mount, MLCC", Packaging="Cut Tape (CT)", Pricing 1="1=0.18, 10=0.122, 100=0.0579, 250=0.04872, 500=0.0408, 1000=0.03348, 5000=0.02831 (CAD)", RoHS="RoHS Compliant", Size / Dimension="0.039\" L x 0.020\" W (1.00mm x 0.50mm)", Stock 1=218263, Supplier 1=Digi-Key, Thickness (Max)="0.022\" (0.55mm)"
C5 C6: library part 2.2uF_10V_0402, "CAP CER 2.2UF 10V 20% X5R 0402", Capacitance=2.2µF, Manufacturer="Taiyo Yuden", Manufacturer Part Number=LMK105BJ225MV-F, Operating Temperature="-55°C ~ 85°C", Package / Case="0402 (1005 Metric)", Ratings=-, Supplier Part Number 1=587-3153-1-ND, Temperature Coefficient=X5R, Tolerance=±20%, Voltage - Rated=10V, Applications="General Purpose", Category=Capacitors, ComponentLink1Description=http://www.yuden.co.jp/ut/product/category/capacitor/LMK105BJ225MV-F.pdf, ComponentLink1URL=http://www.yuden.co.jp/ut/product/category/capacitor/LMK105BJ225MV-F.pdf, Features=-, Height - Seated (Max)=-, Lead Spacing=-, Lead Style=-, Mounting Type="Surface Mount, MLCC", Packaging="Cut Tape (CT)", Pricing 1="1=0.26, 10=0.173, 50=0.105, 100=0.0881, 250=0.07132, 500=0.0629, 1000=0.05348, 2500=0.04928, 5000=0.04509 (CAD)", RoHS="RoHS Compliant", Size / Dimension="0.039\" L x 0.020\" W (1.00mm x 0.50mm)", Stock 1=258065, Supplier 1=Digi-Key, Thickness (Max)="0.022\" (0.55mm)"
C7 C8 C10 C11: library part 100uF_6.3v_1206_X5R, "CAP CER 100UF 6.3V X5R 1206", Capacitance=100µF, Manufacturer="Murata Electronics North America", Manufacturer Part Number=GRM31CR60J107ME39L, Operating Temperature="-55°C ~ 85°C", Package / Case="1206 (3216 Metric)", Ratings=-, Supplier Part Number 1=490-4539-1-ND, Temperature Coefficient=X5R, Tolerance=±20%, Voltage - Rated=6.3V, Applications="General Purpose", Category=Capacitors, ComponentLink1Description=http://www.murata.com/~/media/webrenewal/support/library/catalog/products/capacitor/mlcc/c02e.pdf, ComponentLink1URL=http://www.murata.com/~/media/webrenewal/support/library/catalog/products/capacitor/mlcc/c02e.pdf, Features=-, Height - Seated (Max)=-, Lead Spacing=-, Lead Style=-, Mounting Type="Surface Mount, MLCC", Packaging="Cut Tape (CT)", Pricing 1="1=1.23, 10=1.048, 50=0.771, 100=0.6128, 250=0.51396, 500=0.46456, 1000=0.42502 (CAD)", RoHS="RoHS Compliant", Size / Dimension="0.126\" L x 0.063\" W (3.20mm x 1.60mm)", Stock 1=450179, Supplier 1=Digi-Key, Thickness (Max)="0.071\" (1.80mm)"
C9 C25: library part 1uF_25V_0402, "CAP CER 1UF 25V 10% X5R 0402", Capacitance=1µF, Manufacturer="TDK Corporation", Manufacturer Part Number=C1005X5R1E105K050BC, Operating Temperature="-55°C ~ 85°C", Package / Case="0402 (1005 Metric)", Ratings=-, Supplier Part Number 1=445-9066-1-ND, Temperature Coefficient=X5R, Tolerance=±10%, Voltage - Rated=25V, Applications="General Purpose", Category=Capacitors, ComponentLink1Description=http://product.tdk.com/en/catalog/datasheets/mlcc_commercial_general_en.pdf, ComponentLink1URL=http://product.tdk.com/en/catalog/datasheets/mlcc_commercial_general_en.pdf, Features=-, Height - Seated (Max)=-, Lead Spacing=-, Lead Style=-, Mounting Type="Surface Mount, MLCC", Packaging="Cut Tape (CT)", Pricing 1="1=0.27, 10=0.185, 100=0.0878, 250=0.074, 500=0.06196, 1000=0.05087, 5000=0.04301 (CAD)", RoHS="RoHS Compliant", Size / Dimension="0.039\" L x 0.020\" W (1.00mm x 0.50mm)", Stock 1=310467, Supplier 1=Digi-Key, Thickness (Max)="0.022\" (0.55mm)"
C12 C23: library part 10uF_10V_0603, "CAP CER 10UF 10V 20% X5R 0603", Capacitance=10µF, Manufacturer="Taiyo Yuden", Manufacturer Part Number=LMK107BBJ106MAHT, Operating Temperature="-55°C ~ 85°C", Package / Case="0603 (1608 Metric)", Ratings=AEC-Q200, Supplier Part Number 1=587-3412-1-ND, Temperature Coefficient=X5R, Tolerance=±20%, Voltage - Rated=10V, Applications=Automotive, Category=Capacitors, ComponentLink1Description=http://www.yuden.co.jp/productdata/catalog/en/mlcc01_hq_e.pdf, ComponentLink1URL=http://www.yuden.co.jp/productdata/catalog/en/mlcc01_hq_e.pdf, Features=-, Height - Seated (Max)=-, Lead Spacing=-, Lead Style=-, Mounting Type="Surface Mount, MLCC", Packaging="Cut Tape (CT)", Pricing 1="1=0.5, 10=0.437, 50=0.266, 100=0.2189, 250=0.17516, 500=0.15952, 1000=0.14107 (CAD)", RoHS="RoHS Compliant", Size / Dimension="0.063\" L x 0.031\" W (1.60mm x 0.80mm)", Stock 1=90195, Supplier 1=Digi-Key, Thickness (Max)="0.035\" (0.90mm)"
C18 C19: library part 13pF_50V_0402, "CAP CER 13PF 50V 5% NP0 0402", Manufacturer="Samsung Electro-Mechanics America, Inc", Manufacturer Part Number=CL05C130JB5NNNC, Operating Temperature="-55°C ~ 125°C", Package / Case="0402 (1005 Metric)", Ratings=-, Supplier Part Number 1=1276-1642-1-ND, Temperature Coefficient="C0G, NP0", Tolerance=±5%, Voltage - Rated=50V, Applications="General Purpose", Capacitance=13pF, Category=Capacitors, ComponentLink1Description=http://www.samsungsem.com/kr/front/downloadcms.do?path=/kr/support/product-search/mlcc/__icsFiles/afieldfile/2014/11/05&fileName=S_CL05C130JB5NNNC.pdf, ComponentLink1URL=http://www.samsungsem.com/kr/front/downloadcms.do?path=/kr/support/product-search/mlcc/__icsFiles/afieldfile/2014/11/05&fileName=S_CL05C130JB5NNNC.pdf, Features=-, Height - Seated (Max)=-, Lead Spacing=-, Lead Style=-, Mounting Type="Surface Mount, MLCC", Packaging="Cut Tape (CT)", Pricing 1="1=0.14, 10=0.064, 25=0.0448, 100=0.0291, 500=0.02032, 1000=0.01583, 2500=0.01425, 5000=0.01319 (CAD)", RoHS="RoHS Compliant", Size / Dimension="0.039\" L x 0.020\" W (1.00mm x 0.50mm)", Stock 1=16490, Supplier 1=Digi-Key, Thickness (Max)="0.022\" (0.55mm)"
C24: library part 2.2uF_35V_0603, "CAP CER 2.2UF 35V 10% X5R 0603", Capacitance=2.2µF, Manufacturer="Murata Electronics North America", Manufacturer Part Number=GRM188R6YA225KA12D, Operating Temperature="-55°C ~ 85°C", Package / Case="0603 (1608 Metric)", Ratings=-, Supplier Part Number 1=490-7204-1-ND, Temperature Coefficient=X5R, Tolerance=±10%, Voltage - Rated=35V, Applications="General Purpose", Category=Capacitors, ComponentLink1Description=http://www.murata.com/~/media/webrenewal/support/library/catalog/products/capacitor/mlcc/c02e.ashx, ComponentLink1URL=http://www.murata.com/~/media/webrenewal/support/library/catalog/products/capacitor/mlcc/c02e.ashx, Features=-, Height - Seated (Max)=-, Lead Spacing=-, Lead Style=-, Mounting Type="Surface Mount, MLCC", Packaging="Cut Tape (CT)", Pricing 1="1=0.31, 10=0.214, 50=0.1298, 100=0.109, 250=0.08832, 500=0.07792, 1000=0.06624 (CAD)", RoHS="RoHS Compliant", Size / Dimension="0.063\" L x 0.031\" W (1.60mm x 0.80mm)", Stock 1=55248, Supplier 1=Digi-Key, Thickness (Max)="0.031\" (0.80mm)"
D1 D2: library part "TOPLED 0803", "LED TOPLED 630NM SUP RED CLR SMD", Color=Red, Current - Test=2mA, Luminous Flux @ Current - Test="25 mlm", Manufacturer="OSRAM Opto Semiconductors Inc", Manufacturer Part Number="LS M67K-H2L1-1-Z", Millicandela Rating=8.78mcd, Package / Case="2-SMD, J-Lead", Supplier Part Number 1=475-2510-1-ND, Voltage - Forward (Vf) (Typ)=1.8V, Category=Optoelectronics, ComponentLink1Description=http://media.digikey.com/pdf/Data%20Sheets/Osram%20PDFs/LS,LO,LY_M67K.pdf, ComponentLink1URL=http://media.digikey.com/pdf/Data%20Sheets/Osram%20PDFs/LS,LO,LY_M67K.pdf, Height=1.30mm, Lens Style/Size="Rectangle with Flat Top, 1.5mm x 1mm", Lens Type=Clear, Mounting Type="Surface Mount", Packaging="Cut Tape (CT)", Pricing 1="1=0.19, 10=0.162, 100=0.1295, 250=0.11328, 500=0.10354 (CAD)", RoHS="RoHS Compliant", Size / Dimension="2.20mm L x 1.40mm W", Stock 1=23262, Supplier 1=Digi-Key, Viewing Angle=120°, Wavelength - Dominant=630nm, Wavelength - Peak=643nm
ECSE2 ECSE3 ESC1: library part "Header 4X2A", "Header, 4-Pin, Dual row", LatestRevisionDate=17-Jul-2002, LatestRevisionNote="Re-released for DXP Platform.", Publisher="Altium Limited"
F1: library part 40O_550mA_0402, "FERRITE CHIP 40 OHM 550MA 0402", DC Resistance (DCR)="120 mOhm Max", Impedance @ Frequency="40 Ohm @ 100MHz", Manufacturer="TDK Corporation", Manufacturer Part Number=MMZ1005Y400CT000, Package / Case="0402 (1005 Metric)", Supplier Part Number 1=445-2150-1-ND, Category=Filters, ComponentLink1Description=http://product.tdk.com/emc/beads/en/documents/beads_commercial_signal_mmz_en.pdf, ComponentLink1URL=http://product.tdk.com/emc/beads/en/documents/beads_commercial_signal_mmz_en.pdf, Current Rating=550mA, Filter Type="Differential Mode - Single", Height (Max)="0.022\" (0.55mm)", Mounting Type="Surface Mount", Packaging="Cut Tape (CT)", Pricing 1="1=0.14, 10=0.099, 100=0.059, 250=0.04284, 500=0.03928, 1000=0.03393, 5000=0.02679 (CAD)", RoHS="RoHS Compliant", Size / Dimension="0.039\" L x 0.020\" W (1.00mm x 0.50mm)", Stock 1=1706, Supplier 1=Digi-Key
HALL1 HALL2 Hall3: library part "Header 3X2H", "Header, 3-Pin, Dual row, Right Angle", LatestRevisionDate=17-Jul-2002, LatestRevisionNote="Re-released for DXP Platform.", Publisher="Altium Limited"
L1: library part "Ferrite_200 ohms_2A", "FILTER CHIP 220 OHM 2A 0603", Current Rating=2A, DC Resistance (DCR)="50 mOhm Max", Impedance @ Frequency="220 Ohm @ 100MHz", Manufacturer="Murata Electronics North America", Manufacturer Part Number=BLM18EG221SN1D, Package / Case="0603 (1608 Metric)", Supplier Part Number 1=490-3992-1-ND, Category=Filters, ComponentLink1Description=http://search.murata.co.jp/Ceramy/image/img/PDF/ENG/L0110S0101BLM18E.pdf, ComponentLink1URL=http://search.murata.co.jp/Ceramy/image/img/PDF/ENG/L0110S0101BLM18E.pdf, Filter Type="Differential Mode - Single", Height (Max)="0.037\" (0.95mm)", Mounting Type="Surface Mount", Packaging="Cut Tape (CT)", Pricing 1="1=0.33, 10=0.254, 50=0.1814, 100=0.1632, 250=0.13784, 500=0.12332, 1000=0.10519 (CAD)", RoHS="RoHS Compliant", Size / Dimension="0.063\" L x 0.031\" W (1.60mm x 0.80mm)", Stock 1=382631, Supplier 1=Digi-Key
LineDriver1 LineDriver2 LineDriver3: "Low-Power Differential Line Driver And Receiver Pair", Manufacturer="Texas Instruments", PACKAGE_DESIGNATOR=D, Copyright="Copyright (C) 2018 Accelerated Designs. All rights reserved", Datasheet_URL=http://www.ti.com/lit/gpn/SN75LBC179, FAMILY_NAME=RS-485, GENERIC_PART_NUMBER=SN75LBC179, INDUSTRY_STD_PKG_TYPE=SOIC, Manufacturer_Part_Number=SN75LBC179D, PIN_COUNT=8, RefDes=RefDes, Type=DEV, Vendor="Texas Instruments"
P1: "Header, 5-Pin", LatestRevisionDate=17-Jul-2002, LatestRevisionNote="Re-released for DXP Platform.", Publisher="Altium Limited"
R1: library part 1M_5%_1206, "RES SMD 1M OHM 5% 1/4W 1206", Manufacturer="Panasonic Electronic Components", Manufacturer Part Number=ERJ-8GEYJ105V, Operating Temperature="-55°C ~ 155°C", Package / Case="1206 (3216 Metric)", Power (Watts)="0.25W, 1/4W", Supplier Device Package=1206, Supplier Part Number 1=P1.0MECT-ND, Temperature Coefficient=±200ppm/°C, Tolerance=±5%, Category=Resistors, ComponentLink1Description=http://industrial.panasonic.com/www-cgi/jvcr13pz.cgi?E+PZ+3+AOA0001+ERJ8GEYJ105V+7+WW, ComponentLink1URL=http://industrial.panasonic.com/www-cgi/jvcr13pz.cgi?E+PZ+3+AOA0001+ERJ8GEYJ105V+7+WW, Composition="Thick Film", Features="Automotive AEC-Q200", Height="0.028\" (0.70mm)", Number of Terminations=2, Packaging="Cut Tape (CT)", Pricing 1="1=0.14, 50=0.038, 100=0.029, 250=0.02152, 500=0.01588, 1000=0.01059, 2500=0.00894 (CAD)", Resistance (Ohms)=1M, RoHS="RoHS Compliant", Size / Dimension="0.126\" L x 0.063\" W (3.20mm x 1.60mm)", Stock 1=165352, Supplier 1=Digi-Key
R2 R3 R4 R5 R6 R7: library part 10k_1%_0402, "RES SMD 10K OHM 1% 1/10W 0402", Manufacturer="Panasonic Electronic Components", Manufacturer Part Number=ERJ-2RKF1002X, Operating Temperature="-55°C ~ 155°C", Package / Case="0402 (1005 Metric)", Power (Watts)="0.1W, 1/10W", Supplier Device Package=0402, Supplier Part Number 1=P10.0KLCT-ND, Temperature Coefficient=±100ppm/°C, Tolerance=±1%, Category=Resistors, ComponentLink1Description=http://industrial.panasonic.com/www-cgi/jvcr13pz.cgi?E+PZ+3+AOA0002+ERJ2RKF1002X+7+WW, ComponentLink1URL=http://industrial.panasonic.com/www-cgi/jvcr13pz.cgi?E+PZ+3+AOA0002+ERJ2RKF1002X+7+WW, Composition="Thick Film", Features="Automotive AEC-Q200", Height="0.016\" (0.40mm)", Number of Terminations=2, Packaging="Cut Tape (CT)", Pricing 1="1=0.14, 50=0.0282, 100=0.0215, 250=0.01592, 500=0.01176, 1000=0.00784, 5000=0.00551 (CAD)", Resistance (Ohms)=10k, RoHS="RoHS Compliant", Size / Dimension="0.039\" L x 0.020\" W (1.00mm x 0.50mm)", Stock 1=5818216, Supplier 1=Digi-Key
R8 R9: library part 27_1%_0402, "RES SMD 27 OHM 1% 1/10W 0402", Manufacturer="Panasonic Electronic Components", Manufacturer Part Number=ERJ-2RKF27R0X, Operating Temperature="-55°C ~ 155°C", Package / Case="0402 (1005 Metric)", Power (Watts)="0.1W, 1/10W", Supplier Device Package=0402, Supplier Part Number 1=P27.0LCT-ND, Temperature Coefficient=±100ppm/°C, Tolerance=±1%, Category=Resistors, ComponentLink1Description=http://industrial.panasonic.com/www-cgi/jvcr13pz.cgi?E+PZ+3+AOA0002+ERJ2RKF27R0X+7+WW, ComponentLink1URL=http://industrial.panasonic.com/www-cgi/jvcr13pz.cgi?E+PZ+3+AOA0002+ERJ2RKF27R0X+7+WW, Composition="Thick Film", Features="Automotive AEC-Q200", Height="0.016\" (0.40mm)", Number of Terminations=2, Packaging="Cut Tape (CT)", Pricing 1="1=0.16, 50=0.0234, 100=0.0171, 250=0.01308, 500=0.01048, 1000=0.00771, 5000=0.00553 (CAD)", Resistance (Ohms)=27, RoHS="RoHS Compliant", Size / Dimension="0.039\" L x 0.020\" W (1.00mm x 0.50mm)", Stock 1=490131, Supplier 1=Digi-Key
R13 R14: library part 120_1%_0402, "RES SMD 120 OHM 1% 1/10W 0402", Manufacturer="Panasonic Electronic Components", Manufacturer Part Number=ERJ-2RKF1200X, Operating Temperature="-55°C ~ 155°C", Package / Case="0402 (1005 Metric)", Power (Watts)="0.1W, 1/10W", Supplier Device Package=0402, Supplier Part Number 1=P120LCT-ND, Temperature Coefficient=±100ppm/°C, Tolerance=±1%, Category=Resistors, ComponentLink1Description=http://industrial.panasonic.com/www-cgi/jvcr13pz.cgi?E+PZ+3+AOA0002+ERJ2RKF1200X+7+WW, ComponentLink1URL=http://industrial.panasonic.com/www-cgi/jvcr13pz.cgi?E+PZ+3+AOA0002+ERJ2RKF1200X+7+WW, Composition="Thick Film", Features="Automotive AEC-Q200", Height="0.016\" (0.40mm)", Number of Terminations=2, Packaging="Cut Tape (CT)", Pricing 1="1=0.14, 50=0.0282, 100=0.0215, 250=0.01592, 500=0.01176, 1000=0.00784, 5000=0.00551 (CAD)", Resistance (Ohms)=120, RoHS="RoHS Compliant", Size / Dimension="0.039\" L x 0.020\" W (1.00mm x 0.50mm)", Stock 1=184236, Supplier 1=Digi-Key
TransConn1 TransConn2 TransConn2: "Header, 6-Pin", LatestRevisionDate=17-Jul-2002, LatestRevisionNote="Re-released for DXP Platform.", Publisher="Altium Limited"
U1: "500 mA, Low Voltage, Low Quiescent Current LDO Regulator", Current - Limit (Min)=-, Current - Output=500mA, Manufacturer="Microchip Technology", Operating Temperature="-40°C ~ 125°C", Package / Case="TO-261-4, TO-261AA", Supplier Device Package=SOT-223-3, Supplier Part Number 1=MCP1825S-3302E/DB-ND, Voltage - Dropout (Typical)="0.21V @ 500mA", Voltage - Input="Up to 6V", Voltage - Output=3.3V, Category="Integrated Circuits (ICs)", ComponentLink1Description=http://www.microchip.com/mymicrochip/filehandler.aspx?ddocname=en531698, ComponentLink1URL=http://www.microchip.com/mymicrochip/filehandler.aspx?ddocname=en531698, Manufacturer Part Number=MCP1825S-3302E/DB, Mounting Type="Surface Mount", Number of Regulators=1, Packaging=Tube, Pricing 1="1=0.61, 10=0.51, 25=0.43, 100=0.39 (USD)", Regulator Topology="Positive Fixed", RoHS="RoHS Compliant", Stock 1=5172, Supplier 1=Digi-Key
U2: "Tiva TM4C123GH6PM Microcontroller ARM Cortex 80 MHz FPU", Supplier Part Number 1=296-35848-ND, Supplier 1=Digi-Key
U3: library part FT230XQ-R, "IC USB SERIAL BASIC UART 16QFN", Current - Supply=8mA, Manufacturer="FTDI, Future Technology Devices International Ltd", Operating Temperature="-40°C ~ 85°C", Package / Case="16-WQFN Exposed Pad", Supplier Device Package="16-QFN (4x4)", Supplier Part Number 1=768-1130-1-ND, Voltage - Supply="3.3 V ~ 5 V", Category="Integrated Circuits (ICs)", ComponentLink1Description=http://www.ftdichip.com/Support/Documents/DataSheets/ICs/DS_FT230X.pdf, ComponentLink1URL=http://www.ftdichip.com/Support/Documents/DataSheets/ICs/DS_FT230X.pdf, Function="Bridge, USB to UART", Interface=UART, Manufacturer Part Number=FT230XQ-R, Packaging="Cut Tape (CT)", Pricing 1="1=2.64, 25=2.5508, 100=2.4601, 250=2.21412, 500=1.994, 1000=1.89042, 2500=1.86128 (CAD)", Protocol=USB, RoHS="RoHS Compliant", Standards="USB 2.0", Stock 1=7567, Supplier 1=Digi-Key
USB1: library part "MOLEX 0670688010", Supplier Part Number 1=WM4064-ND, Supplier 1=Digi-Key
X1: library part 403C35E16M00000, "CRYSTAL 16MHZ 20PF SMD", ESR (Equivalent Series Resistance)="80 Ohm", Frequency=16MHz, Frequency Stability=±50ppm, Frequency Tolerance=±30ppm, Load Capacitance=20pF, Manufacturer="CTS-Frequency Controls", Operating Mode=Fundamental, Operating Temperature="-20°C ~ 70°C", Package / Case="4-SMD, No Lead (DFN, LCC)", Ratings=-, Supplier Part Number 1=CTX1293CT-ND, Category="Crystals and Oscillators", ComponentLink1Description=http://www.ctscorp.com/components/Datasheets/008-0288-0_F.pdf, ComponentLink1URL=http://www.ctscorp.com/components/Datasheets/008-0288-0_F.pdf, Height="0.031\" (0.80mm)", Manufacturer Part Number=403C35E16M00000, Mounting Type="Surface Mount", Packaging="Cut Tape (CT)", Pricing 1="1=1.07, 10=0.95, 50=0.8866, 100=0.7847, 500=0.7415, 750=0.70228, 1000=0.61988 (CAD)", RoHS="RoHS Compliant", Size / Dimension="0.126\" L x 0.098\" W (3.20mm x 2.50mm)", Stock 1=7029, Supplier 1=Digi-Key, Type="MHz Crystal"

## Via types
v1: diameter 30, hole 28, Top Layer to Bottom Layer, 82 vias
v2: diameter 50, hole 28, Top Layer to Bottom Layer, 2 vias
v3: diameter 30, hole 30, Top Layer to Bottom Layer, 1 vias

## Nets (pads, with @x,y where several pads share a name; then routed paths per layer and width w, separated by ;. In a path a pad name is that pad's centre, name@x,y a point inside that pad or via, vN(x,y) a via of type N, cw(c..) or ccw(c..) an arc to the next point about the centre after c; other vN are vias at no path point)
5VHS1: ESC1.2 HALL1.4 | length 944.9
  Top Layer w10: HALL1.4 2870,1790 2925,1845 3400,1845 3550,1695 ESC1.2
5VHS2: ECSE2.2 HALL2.4 | length 642.7
  Top Layer w8: ECSE2.2@1380,3020 1390,3020 1435,3065 1510,3065 1650,3205 1650,3395 1592.5,3452.5 HALL2.4@1575,3435
5VHS3: ECSE3.2 Hall3.4 | length 1605.1
  Bottom Layer w10: ECSE3.2 2601.44,4063.56 2590,4075 2590,4410 2780,4600 3220,4600 3354.51,4465.49 3354.51,4410.49 3370,4395 3485.87,4395 Hall3.4@3530.87,4350
+3.3V: C10.1 C11.1 C12.1 C13.2 C14.2 C15.2 C16.2 C17.2 C20.2 C28.2 C29.2 F1.1 R2.1 R3.1 R4.2 R5.2 R6.2 R7.2 R13.2 R14.2 U1.3 U2.11 U2.26 U2.37 U2.42 U2.54 U3.1 U3.8 U3.9 U3.10 | length 10189.5
  Top Layer w8: v1(2880.5,3490.98) 2880,3559.05 2987.84,3666.89 C14.2 ; v1@3090,3510.15 v1(3090,3515) ; 3510,3265.72 3510.28,3266 3511.15,3266 ; U2.26@3519.02,3434.69 U2.26 U2.26@3519.68,3435.36 ; U2.42@3686.84,3685.04 U2.42 ; R3.1@4067.39,3280.89 4073.52,3284.68 R3.1@4075.46,3284.22 ; v1(4135,2850) v1@4135,2861.33 ; v1@4183.88,2615 v1(4190,2615) ; v1(4645,2876.44) v1@4645,2887.31
  Top Layer w10: v1(2405,2330) 2405,2818.91 2954.7,3368.61 3096.68,3368.61 3118.07,3390 C13.2 v1@3212.21,3457.21 ; v1@3090,3510.15 3125.11,3510.15 3221.26,3606.3 U2.11 ; F1.1 3471.58,4146.21 3571.07,4146.21 R2.1 3592.28,4070.79 C16.2 3576.5,3988.35 3553.11,3964.97 3553.11,3926.26 3538.7,3911.85 U2.54 3538.7,3822.61 3676.27,3685.04 3686.84,3685.04 3684.06,3682.26 3683.27,3682.26 3667.72,3666.7 3667.72,3627.87 3673.37,3622.22 3673.37,3599.3 3683.27,3589.39 3706.2,3589.39 U2.37 3731.9,3586.61 3744.58,3573.93 3744.58,3572.79 3748.37,3569 3752.96,3569 3775,3546.96 3775,3535 C20.2@3855,3455 ; 3510,3265.72 3510,3250 3516.89,3243.11 C17.2 ; 3511.15,3266 3534,3288.85 3534,3309.81 3515,3328.81 v1(3515,3370) v1@3516.24,3371.24 ; v1@3519.02,3371.24 3519.02,3434.69 U2.26@3519.68,3435.36 ; U2.26 3519.02,3461.57 3644.06,3586.61 3681.54,3586.61 ; C20.2 3860,3435 4002.72,3292.28 4019.2,3292.28 R3.1@4067.39,3280.89 ; v1(3900,2946.82) 3825,3021.82 3825,3055 3945,3175 v1@4146.21,3175 ; R3.1@4075.46,3284.22 4133.96,3320.34 4139.79,3345 v1(4190,3345) ; v1(4135,2850) 4135,2663.88 v1@4183.88,2615 ; v1@4607.5,2952.5 4622.5,2937.5 4622.5,2909.81 v1@4645,2887.31
  Bottom Layer w8: C12.1 2168.23,2397.44 C11.1 2312.83,2375.67 C10.1 ; v1@3090,3510.2 v1(3090,3515) ; v1@3512.37,3365.04 3515,3367.67 v1(3515,3370) ; v1@4188.14,2616.86 4250,2678.71 ; C28.2@4250,2708.78 C28.2 ; U3.9 U3.8 ; 4442.76,3053.11 4442.76,3054.17 ; 4462.59,2902.59 U3.1 4469.26,2897.72 4482.62,2897.72 ; R6.2 R6.2@4540,3055 ; R5.2 4636.21,2867.65 v1(4645,2876.44) ; v1@4593.84,2965 v1(4606.89,2965)
  Bottom Layer w10: C10.1 2357.17,2377.83 v1(2405,2330) 2654.72,2330 U1.3 ; v1(2880.5,3490.98) v1@3090,3510.15 ; v1@3090,3510.2 3142.57,3457.63 v1(3211.79,3457.63) 3211.79,3416.02 3255.46,3372.35 3499.88,3372.35 3507.19,3365.04 v1@3512.37,3365.04 ; v1(3900,2946.82) 3972.18,3019 4003.72,3019 R13.2@4032.72,2990 ; v1(4135,2850) 4196.22,2850 C29.2 ; v1(4160,3172.6) 4160,3315 v1(4190,3345) ; 4250,2678.71 C28.2@4250,2708.78 ; U3.9 U3.10 4304.91,2839.87 4191.59,2726.56 3868.29,2726.56 3676,2918.85 3676,2966 3690,2980 3788.45,2980 3873.45,3065 4435,3065 4460,3090 4554.17,3090 4599.37,3044.8 4599.37,3014.47 4482.62,2897.72 ; R4.2 4405.83,3016.18 4442.76,3053.11 ; 4442.76,3054.17 4467.86,3079.27 4515.73,3079.27 4540,3055 4565.18,3055 4585.83,3034.36 4585.83,3025.83 4462.59,2902.59 ; U3.1 4519.89,2891.05 v1@4593.84,2965 ; R5.2 4605.99,2905.92 4625.72,2905.92 4644.8,2925 4747.72,2925 R14.2 ; v1(4645,2876.44) 4685,2836.44 R7.2
+5V: C4.2 C5.2 C6.2 C7.1 C8.1 C9.2 L1.2 LineDriver1.1 LineDriver2.1 LineDriver3.1 TransConn1.5 TransConn2.5 U1.1 | length 13127.7
  Top Layer w8: LineDriver1.1 3260,1895 v1(3355,1990) v1(3540,1805) ; L1.2 4538.11,2175 C6.2 4728.11,2241.89 C5.2 ; C4.2@4843.11,2243.78 C4.2 C4.2@4845,2246.89
  Top Layer w10: v1@2469.95,4283.85 2370,4383.8 2370,4455.81 2599.19,4685 4270,4685 4319.71,4635.29 LineDriver3.1 ; v1(2505,3280) 2485,3280 2390,3375 2390,3418 LineDriver2.1 2492,3520 v1(2595,3520) ; v1(2699.17,2890) 2699.17,2984.17 v1@2715,3000 ; C5.2 C4.2@4843.11,2243.78 ; TransConn2.5@4920,3460 4935,3445 4980,3445 5020,3405 5020,3375 5020,2280 4981.89,2241.89 C4.2 4845,2220 v1(5085,1980)
  Bottom Layer w8: v1(2595,3520) 2600,3525 2600,3535 ; C7.1 C7.1@2935,2567.17 ; C8.1 3169.06,2567.17 C9.2
  Bottom Layer w10: TransConn1.5@1405,1995 1636.09,1995 1855,2213.91 1855,2276.44 2208.56,2630 2624.72,2630 U1.1 v1(2699.17,2890) ; v1(2480,4275) 2480,4140.81 2625,3995.81 2625,3560 2600,3535 ; v1(2505,3280) 2505,3225.04 v1(2725.04,3005) ; C7.1@2935,2567.17 C8.1 ; C9.2 3233.78,2541.22 3335,2440 3335,2410.15 3354,2391.15 3354,2005 ; v1@3537.5,1802.5 3880,1460 4705,1460 5085,1840 v1(5085,1980)
+24V: "Board Power Connector.2" ECSE2.5 ECSE3.5 ESC1.5 | length 7772.1
  Top Layer w8: v2(3135,1520) v2@3140,1515
  Top Layer w10: ECSE2.5@1480,3120 1395,3205 1285,3205 1245,3245 1245,4240 1555,4550 2084.53,4550 2528.31,4106.22 2742.66,4106.22 ECSE3.5 ; v2@3140,1515 3240,1415 3585,1415 ESC1.5
  Bottom Layer w8: ECSE2.5@1465,3115 ECSE2.5 ; 1480,2380 1489.71,2380
  Bottom Layer w10: ECSE2.5@1465,3115 1410,3060 1355,3060 1290,2995 1290,2730 1370,2650 1530,2650 1590,2590 1590,2480.29 1489.71,2380 ; 1480,2377.83 1284.32,2377.83 1270,2363.51 1270,1600 1365,1505 3120,1505 v2(3135,1520)
+A3.3V: C21.2 C22.2 C23.2 F1.2 U2.2 | length 1024.9
  Top Layer w8: v1@3115,4059.46 v1(3115,4060) ; C23.2 3327.35,4255 F1.2
  Top Layer w10: C21.2 3054.14,3998.6 v1@3115,4059.46 ; v1(3115,4060) 3160.15,4060 3299.68,4199.53 3360.34,4199.53 3397.52,4162.35 F1.2 ; v1(3185,3970) 3150,3935 C22.2 3222.11,3783.46 U2.2
  Bottom Layer w10: v1@3125,4050 3155,4050 3170,4035 3170,3985 v1(3185,3970)
CF1M1: ESC1.6 U2.44 | length 2990.9
  Top Layer w10: U2.44 3737.56,3724.41 3840,3826.85 v1(3840,3925)
  Bottom Layer w10: ESC1.6 3495,1535 3495,1865 3580,1950 3580,2404.71 3710,2534.71 3710,2646.13 3580,2776.13 3580,2951.57 3693.43,3065 3695,3065 3800,3170 3800,3820 3840,3860 v1(3840,3925)
CF1M2: ECSE2.6 U2.9 | length 2050.4
  Top Layer w8: 2528.43,3020 2858.66,3350.23 2858.66,3352.8 3150.86,3645
  Top Layer w10: ECSE2.6@1480,3020 2528.43,3020 ; 3150.86,3645 U2.9@3270,3645
CF1M3: ECSE3.6 U2.6 | length 628.3
  Top Layer w10: v1(3119.21,3724.41) 3195.4,3724.41 3214.73,3705.09 U2.6@3270,3705.09
  Bottom Layer w10: ECSE3.6 2815.25,4048.32 2815.25,4034.75 v1@3122.4,3727.6
CF2M1: ESC1.7 U2.53 | length 2911.4
  Top Layer w10: U2.53 3558.39,3840.04 3571.57,3826.85 3651.85,3826.85 3720.86,3895.86 v1(3777.65,3895.86)
  Bottom Layer w10: ESC1.7 3409.47,1520.53 3409.47,1849.47 3550,1990 3550,2474.71 3625,2549.71 3625,2572.98 3624.77,2573.21 3624.77,2606.79 3625,2607.02 3625,2652.72 3560,2717.72 3560,2975 3765,3180 3765,3885
CF2M2: ECSE2.7 U2.8 | length 2392.1
  Top Layer w10: v1(2019.87,3071.34) 2093.53,3145 2296.81,3145 2325.28,3173.47 2378.41,3173.47 2391.89,3160 2640,3160 3145,3665 U2.8@3270,3665
  Bottom Layer w8: ECSE2.7@1480,2920 1430,2870 1430,2785 1455,2760 1550,2760 1861.34,3071.34 v1(2019.87,3071.34)
CF2M3: ECSE3.7 U2.59 | length 3240.5
  Top Layer w10: ECSE3.7 2880.5,4044.07 2880.5,4145.5 v1(2975,4240) ; v1(3245,4510) 3375,4640 4245,4640 4275,4610 4275,4190 v1(4130,4045) ; U2.59 3440.28,3908.91 3470,3938.63 v1(3470,3970)
  Bottom Layer w10: v1(2975,4240) v1(3245,4510) ; v1@3480,3970 3785,3970 3860,4045 v1(4130,4045)
CF3M1: ESC1.8 U2.10 | length 3476.7
  Top Layer w8: ESC1.8 3400,1530 3575,1530 3595,1550 3595,1990 v1(3460,2125)
  Top Layer w10: v1(3150,3585) 3190.98,3625.98 U2.10
  Bottom Layer w10: v1(3150,3585) 3120,3555 2860,3555 2705,3400 2705,3205 2850,3060 3125,3060 3165,3100 3165,3106.57 3188.43,3130 3230,3130 3250,3110 3250,2955 3290,2915 3290,2782.2 3385.47,2686.73 3385.47,2569.82 3460,2495.29 v1(3460,2125)
CF3M2: ECSE2.8 U2.7 | length 2203.8
  Top Layer w10: v3@1717.5,3127.5 1763.47,3173.47 2290.49,3173.47 2306.49,3189.47 2385.04,3189.47 2386.78,3187.73 2395.53,3196.48 2395.53,3221.34 2404.18,3230 2681.37,3230 3136.37,3685 3175,3685 ; 3175.04,3685.04 U2.7
  Bottom Layer w8: ECSE2.8@1480,2820 1720,3060 v3(1720,3125)
CF3M3: ECSE3.8 U2.60 | length 1150.9
  Top Layer w10: v1(3380,4085) 3430,4035 3430,3921.26 3420.59,3911.85 U2.60
  Bottom Layer w10: ECSE3.8 2759.47,3904.09 2759.47,3980.35 2761.49,3982.37 2761.49,4044.76 2759.47,4046.77 2759.47,4094.96 2773.58,4109.07 2838.27,4109.07 2894.2,4165 3305,4165 3370,4100
CLK1_A: LineDriver1.6 TransConn1.3 | length 979.9
  Top Layer w10: TransConn1.3 1592.17,1797.17 1730,1935 1900,1935 1960,1995 LineDriver1.6
CLK1_B: LineDriver2.6 TransConn2.3@1755,4383.8 | length 1128.4
  Top Layer w10: TransConn2.3@1760,4383.8 1750.07,4373.87 1750.07,3929.93 2070,3610 LineDriver2.6
CLK1_C: LineDriver3.6 TransConn2.3@4920,3660 | length 422.2
  Top Layer w10: LineDriver3.6 4537.71,3654 4920,3654 TransConn2.3@4920,3660
CLK2_A: LineDriver1.5 TransConn1.4 | length 979.7
  Top Layer w10: TransConn1.4 1637.17,1897.17 1705,1965 1705,2000 1740,2035 1895,2035 1905,2045 LineDriver1.5
CLK2_B: LineDriver2.5 TransConn2.4@1855,4383.8 | length 1001.6
  Top Layer w10: TransConn2.4@1855,4383.8 1855,3925 2120,3660 LineDriver2.5
CLK2_C: LineDriver3.5 TransConn2.4@4920,3560 | length 414.6
  Top Layer w10: LineDriver3.5 4533.71,3560 TransConn2.4@4920,3560
CLK_A: LineDriver1.3 U2.19 | length 2111.1
  Top Layer w10: LineDriver1.3@2507,2000 2514.17,1992.83 2989.46,1992.83 3135.81,2139.19 3135.81,2887.53 3405,3156.72 3405,3389.32 3384,3410.32 3384,3432.02 U2.19@3380,3436.02
CLK_B: LineDriver2.3 U2.58 | length 1534.5
  Top Layer w10: LineDriver2.3 2781.72,3610 2981.72,3810 3009.84,3810 3078.27,3878.43 3078.27,3987.73 3110.54,4020 3148.1,4020 3177.42,4049.32 3188.64,4049.32 3264.32,4125 3435,4125 3510,4050 3510,3945 3475,3910 3470.98,3910 3470.98,3908.95 3462.74,3900.7 3462.74,3877.78 U2.58
CLK_C: LineDriver3.3 U2.31 | length 1076.4
  Top Layer w10: U2.31 3617.44,3391.89 3730,3279.33 3730,3275 v1(3855,3150) ; v1(4138.5,3470) 4274.5,3606 4295.71,3606 LineDriver3.3
  Bottom Layer w8: v1@3850,3145 v1(3855,3150)
  Bottom Layer w10: v1(3855,3150) 3895,3190 3895,3226.5 v1(4138.5,3470)
DATA1_A: LineDriver1.8 TransConn1.1 | length 1021.4
  Top Layer w10: TransConn1.1 1597.17,1597.17 1735,1735 1920,1735 2080,1895 LineDriver1.8
DATA1_B: LineDriver2.8 TransConn2.1@1555,4383.8 | length 1363.7
  Top Layer w10: TransConn2.1@1555,4383.8 1555,3925 1970,3510 LineDriver2.8
DATA1_C: LineDriver3.8 TransConn2.1@4920,3860 | length 460.1
  Top Layer w10: LineDriver3.8 4643.71,3860 TransConn2.1@4920,3860
DATA2_A: LineDriver1.7 TransConn1.2 | length 1000.7
  Top Layer w10: TransConn1.2 1577.17,1697.17 1715,1835 1905,1835 2015,1945 LineDriver1.7
DATA2_B: LineDriver2.7 TransConn2.2@1655,4383.8 | length 1263.3
  Top Layer w10: TransConn2.2@1645,4400 1655,4390 1655,4383.8 1655,3925 2020,3560 LineDriver2.7
DATA2_C: LineDriver3.7 TransConn2.2@4920,3760 | length 439.4
  Top Layer w10: LineDriver3.7 4537.71,3704 4558.92,3704 4614.92,3760 TransConn2.2@4920,3760
DATA_A: LineDriver1.2 U2.22 | length 2294.4
  Top Layer w10: LineDriver1.2@2507,1947.17 3207.83,1947.17 3254.41,1993.74 3255,1993.74 3255,2960 3450,3155 3450,3400 3440.28,3409.72 U2.22
DATA_B: LineDriver2.2 U2.57 | length 1220.1
  Top Layer w10: LineDriver2.2 2760,3560 2990,3790 3077.05,3790 3102.64,3764.41 3135.78,3764.41 3139.12,3761.07 v1(3151.07,3761.07) v1@3155,3765 ; v1(3206.79,3848.27) 3232.77,3848.27 3256.98,3824.06 3300.82,3824.06 3304.84,3820.04 3450.04,3820.04 3450,3820 3459.65,3820 3479.65,3840 U2.57
  Bottom Layer w8: v1(3151.07,3761.07) 3151.07,3776.07 3206.79,3831.79 v1(3206.79,3848.27)
DATA_C: LineDriver3.2 U2.29 | length 1341.8
  Top Layer w10: U2.29 3578.07,3463.07 3590,3475 3655,3475 3905,3225 3906,3224 4174,3224 4390,3440 4390,3670.04 4380.04,3680 LineDriver3.2
DM: R8.1 USB1.2 | length 767.4
  Bottom Layer w10: USB1.2 4225,2070.32 4225,2480 4344.17,2599.17 4391.61,2599.17 4410,2617.57 R8.1
DP: R9.1 USB1.3 | length 1081.6
  Bottom Layer w10: USB1.3 4301.57,1835 4311.57,1825 4452.59,1825 4552.72,1925.12 R9.1
GND: "Board Power Connector.1" C1.2 C2.1 C3.1 C4.1 C5.1 C6.1 C7.2 C8.2 C9.1 C10.2 C11.2 C12.2 C13.1 C14.1 C15.1 C16.1 C17.1 C18.1 C19.1 C20.1 C21.1 C22.1 C23.1 C24.1 C25.1 C26.1 C27.1 C28.1 C29.1 ECSE2.3 ECSE3.3 ESC1.3 HALL1.2 HALL2.2 Hall3.2 LineDriver1.4 LineDriver2.4 LineDriver3.4 P1.1 R1.1 TransConn1.6 TransConn2.6 U1.2 U1.4 U2.3 U2.12 U2.27 U2.32 U2.34 U2.35 U2.39 U2.55 U3.3 U3.13 U3.17 USB1.4 X1.2 X1.4 | length 17489.5
  Top Layer w8: LineDriver1.4 2547,2085 v1(2845,2085) ; v1(2687.27,3482.88) 2694.53,3482.88 2756.65,3545 2766.21,3545 2919.32,3698.11 C15.1 3055,3698.11 C14.1 3060,3711.03 3021.03,3750 3011.03,3740 v2(3009.84,3740) ; C25.1 v1(3023.11,3185) ; C24.1 C24.1@2972.56,3262.2 ; v1@3113.78,3963.83 v1(3121.63,3971.69) ; C13.1@3142.28,3350.12 C13.1@3152.76,3350.12 ; v1@3187.38,3315.5 v1(3190.25,3315.5) ; v1(3195.25,2327.06) v1(3195.25,2445.46) ; v1(3530,4105.86) 3530,4104.21 3540.28,4093.93 ; C16.1@3540,4054.72 C16.1 ; Hall3.2@3630.87,4350 3670,4310.87 v1(3670,4225) ; U2.34 U2.34@3709.95,3526.59 ; C18.1 3895,3703.39 X1.4 ; v1(4174.03,2680) 4190,2680 ; USB1.4 4734.06,1915 R1.1 ; C6.1 C6.1@4606.89,2280
  Top Layer w10: ECSE2.3@1380,2920 1320,2860 1320,2785 1400,2705 1726.03,2705 2010.51,2989.47 2526.98,2989.47 2528.34,2990.84 ; TransConn2.6@2055,4383.8 2055,3925 2292.31,3687.69 2333.99,3687.69 2361.68,3660 LineDriver2.4 ; 2529.05,2990.13 2873.66,3334.74 2873.66,3346.59 2931.76,3404.69 2947.88,3404.69 3019.19,3476 3031.92,3476 3032.57,3476.65 3057.43,3476.65 3058.08,3476 3116.81,3476 3227.43,3586.61 U2.12 3320.27,3586.61 3335,3601.34 3335,3733.7 3304.92,3763.78 U2.3 3207.23,3763.78 3179.94,3791.07 3160.91,3791.07 3113.78,3838.2 C22.1 v1@3113.78,3963.83 ; ECSE3.3 2743.56,3920 2872.2,3920 2900,3947.8 2900,3978.43 2941.57,4020 2978.41,4020 C21.1 ; v1(2845,2085) 2845,2286.34 v1@2941.83,2383.17 ; C24.1 2958.11,3245.55 2958.11,3226.89 3000,3185 v1(3023.11,3185) ; C24.1@2972.56,3262.2 3123.33,3262.2 3142.28,3281.15 C13.1@3142.28,3350.12 ; C13.1@3152.76,3350.12 v1@3187.38,3315.5 ; C23.1 3188.43,4255 3165,4278.43 3165,4368.75 3301.25,4505 3430,4505 3440,4515 3550,4515 3585,4480 3585,4395.87 Hall3.2@3630.87,4350 ; U2.55 3519.02,3927.94 3530.87,3939.79 3530.87,3970.67 3540,3979.8 C16.1@3540,4054.72 ; U2.27 3538.7,3405 3548.68,3395.02 3548.68,3360.34 3553.11,3355.91 C17.1 3584.88,3158.23 3584.88,3142.59 v1(3617.47,3110) ; C16.1 3540.28,4093.93 ; U2.32 3650.53,3436.02 3667.85,3418.71 3667.85,3372.22 3833.55,3206.52 4201.86,3206.52 4310.34,3315 v1(4390,3315) 4149.07,3074.07 v1(4149.07,2943.89) 4149.07,2891.08 4174,2866.15 v1(4174.03,2680) ; U2.39 3791.54,3625.98 3805.42,3612.1 3851.89,3612.1 3873.38,3590.61 ; v1(3840,3685) 3876.61,3685 X1.4@3895,3703.39 ; v1@3849.19,3537.4 3860,3526.59 C20.1 3919.33,3493.11 C27.1 3935,3456.69 v1(3970,3421.69) ; v1(3869.02,3320.5) 3849.14,3340.38 3821.2,3340.38 3656.18,3505.39 3656.18,3533.9 3669.53,3547.24 U2.35 U2.34 3742.44,3527.56 4030,3240 4140.15,3240 4319.71,3419.56 LineDriver3.4 ; 3872.8,3590.03 3876.21,3586.61 v1(4004.1,3586.61) ; X1.4 3900,3741.69 3953.31,3795 X1.2 3962.99,3835.62 C19.1 ; C2.1 4249.06,2097.17 C3.1 4326.89,2299.21 C1.2 ; 4190,2680 4367.68,2502.32 C1.2 ; C6.1 4605,2295 4515,2385 4430,2385 4385,2340 C1.2 ; C6.1@4606.89,2280 C5.1 4764.33,2280 4766.22,2278.11 C4.1
  Bottom Layer w8: C10.2@2312.83,2480 C10.2 ; HALL1.2 2770,2010 v1(2845,2085) ; v1(3190.25,3315.5) 3202.19,3303.55 ; C9.1 3195,2455.25 v1@3195.25,2455 ; v1(3530,4105.86) 3543.89,4105.86 v1@3660,4221.98 ; v1@3835,3690 v1(3840,3685) ; v1(4174.03,2680) v1@4185,2680
  Bottom Layer w10: C12.2 2162.56,2452.56 C11.2 C10.2@2312.83,2480 ; C10.2 2453.66,2482.17 U1.4 U1.2 2800,2465 2880,2385 v1(2946.61,2385) ; C7.2 2930,2401.61 v1(2946.61,2385) ; C8.2 2992.17,2385 v1(2946.61,2385) ; v1(3195.25,2327.06) 3004.55,2327.06 v1(2946.61,2385) ; 3202.19,3303.55 3241.79,3303.55 3247.57,3309.33 3421.19,3309.33 3486.34,3244.19 3486.34,3174.82 3551.15,3110 v1(3617.47,3110) ; v1(3840,3685) 3840,3666.85 3845,3661.85 v1(3845,3545) ; v1(3970,3421.69) 4093.31,3545 4184.6,3545 4390,3339.6 v1(4390,3315) ; v1(4149.07,2943.89) 4164.86,2928.11 C29.1 4259.6,2928.11 4281.25,2949.77 4327.11,2949.77 U3.13 4349.4,2892.21 U3.17@4366.61,2875 ; v1@4185,2680 C28.1 ; U3.17@4408.11,2833.27 4455.99,2833.27 U3.3
H1M1: HALL1.5 U2.16 | length 2229.9
  Top Layer w10: v1(3205,3090) 3220.29,3105.29 3220.29,3262.47 3220,3262.76 3220,3295.9 3244,3319.9 3244,3431.63 3270,3457.63 U2.16@3270,3506.65
  Bottom Layer w10: HALL1.5 3070,1625 3404.39,1959.39 3404.39,2505.61 3215,2695 3215,3080 v1(3205,3090)
H1M2: HALL2.5 U2.13 | length 2064.3
  Top Layer w8: v1(2460,3415) 2514.85,3415 2528.85,3429 2819,3429 v1(2825,3435)